# EAGLE board SparkFun_ProDriver_TC78H670FTG-Panel (EAGLE 9.6.2), part 1 of 2
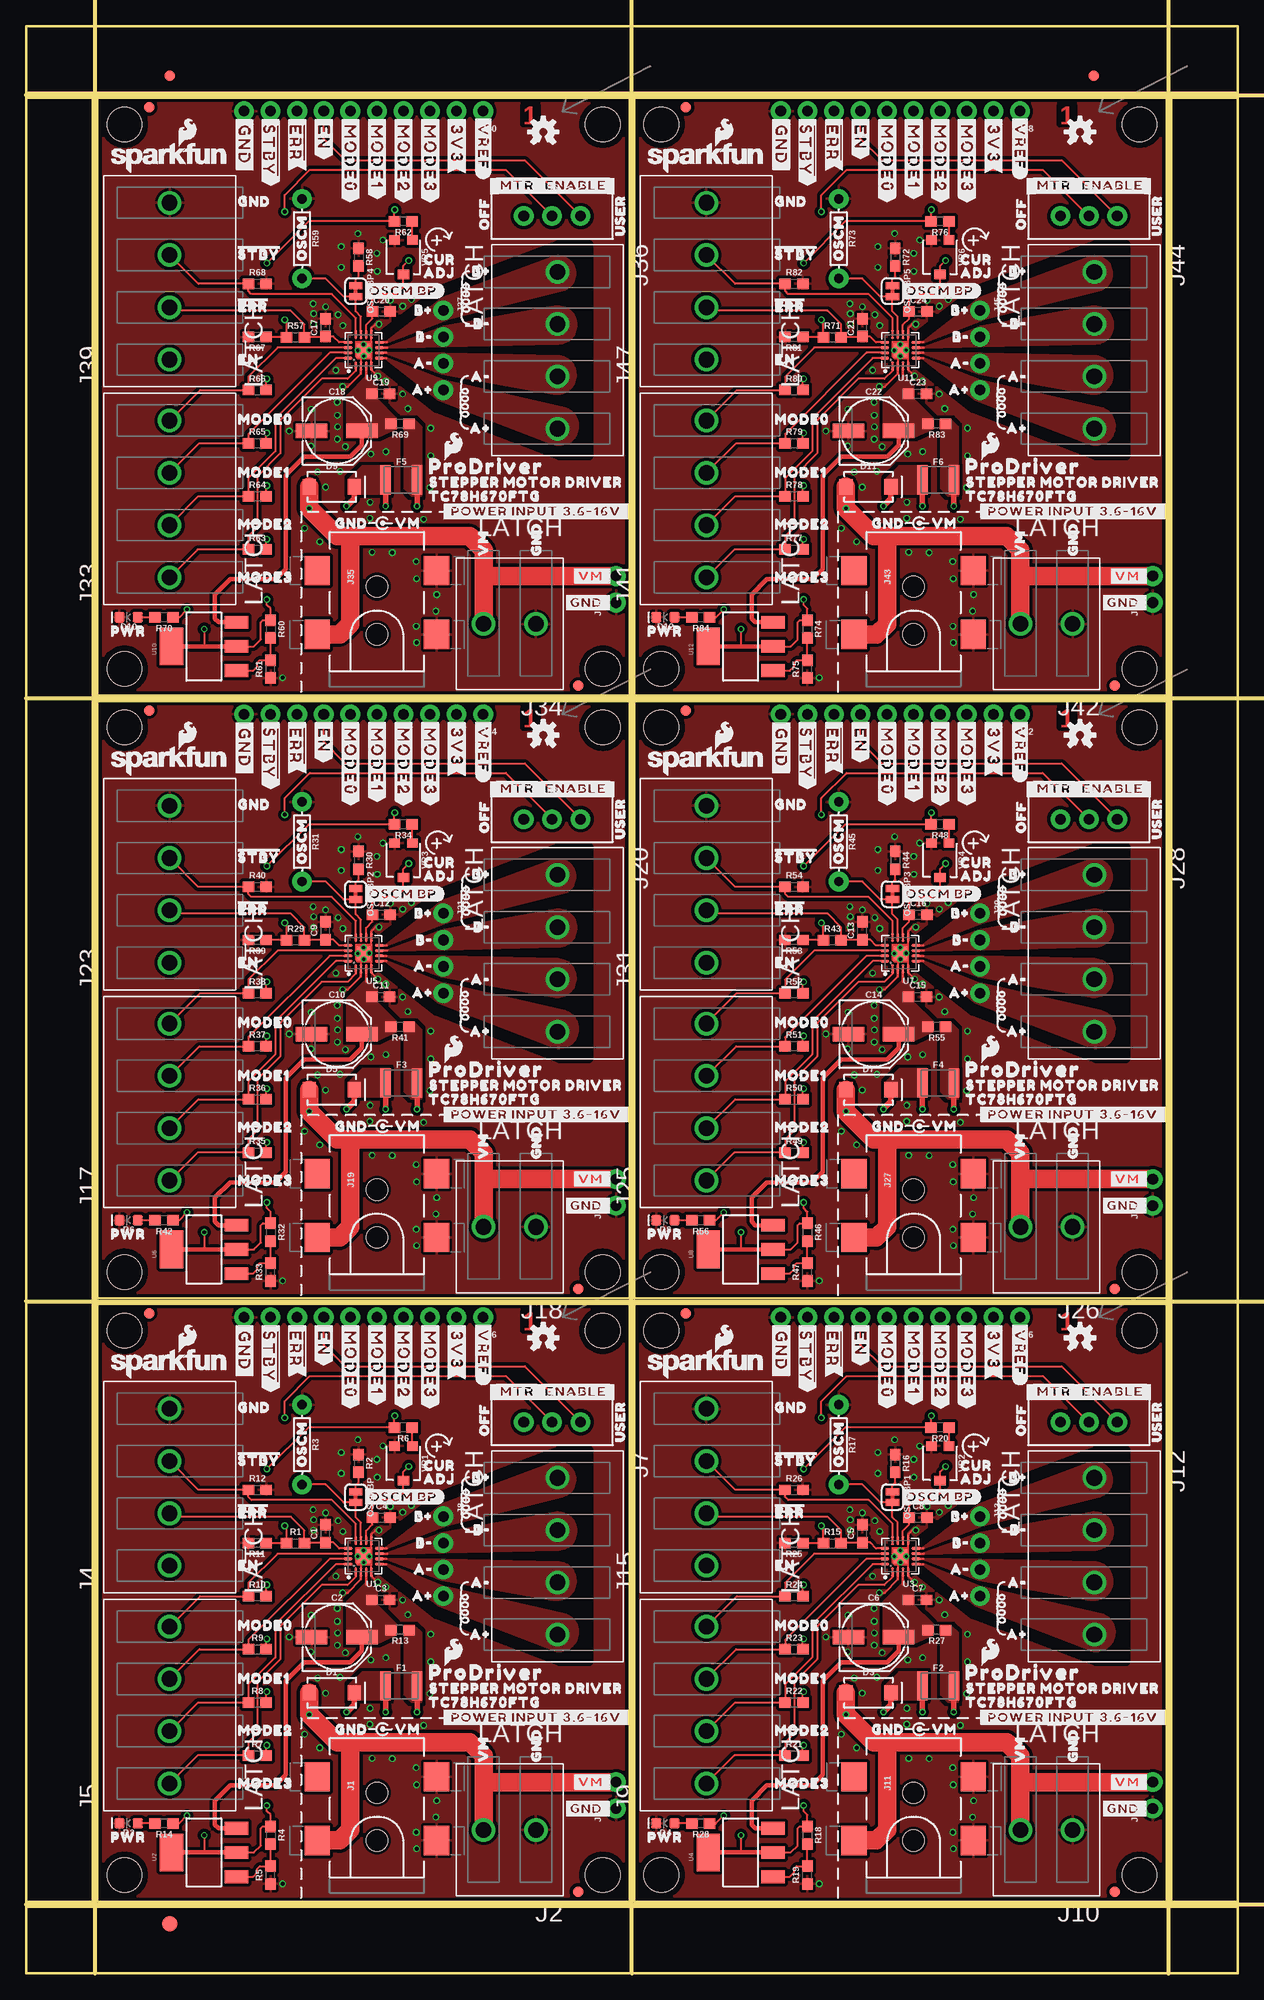
[diagram p0: board, top side]
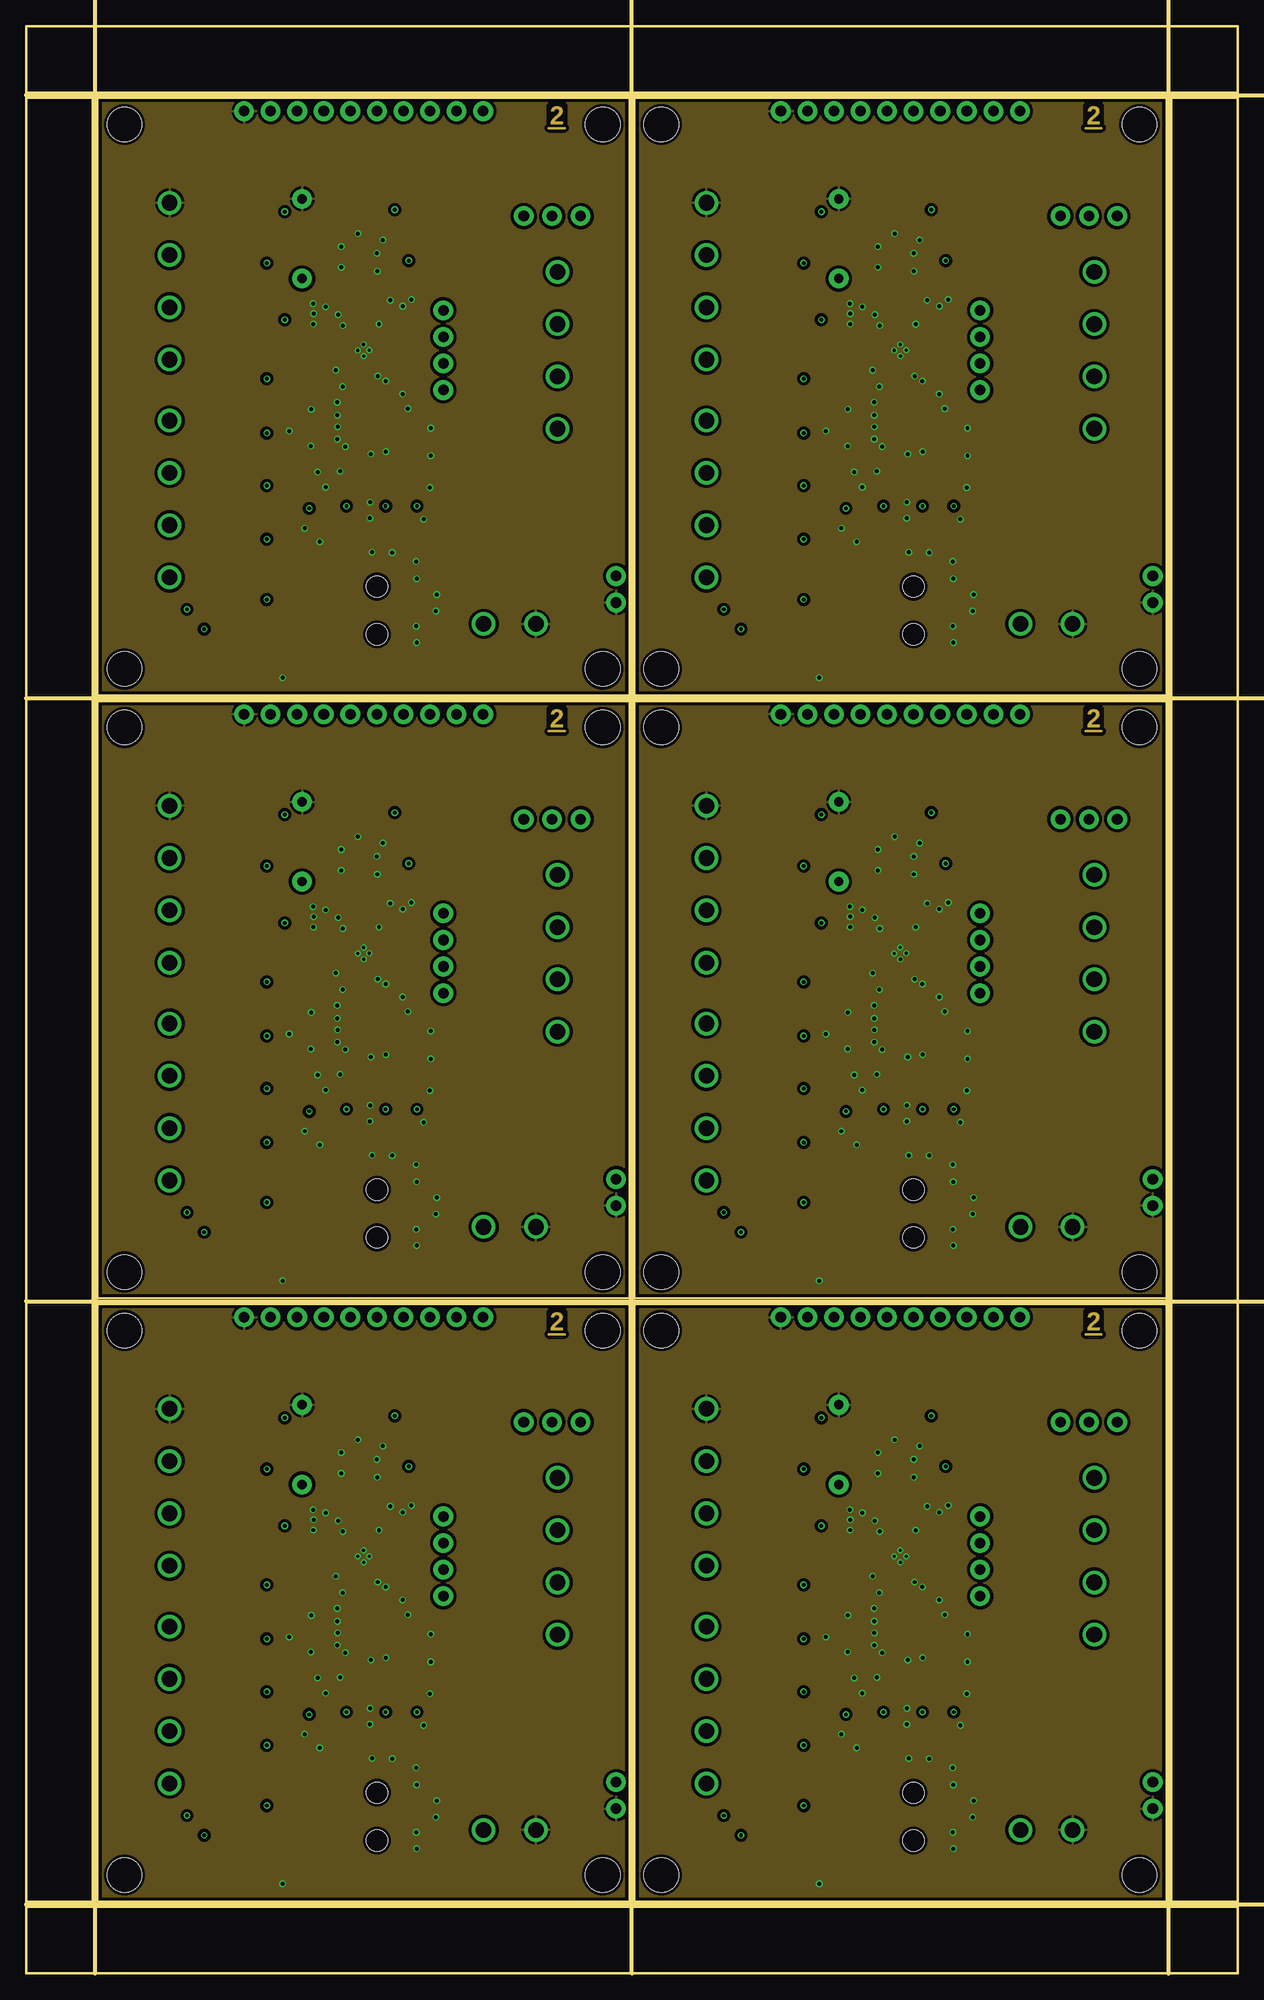
[diagram p1: board, inner layer Route2]
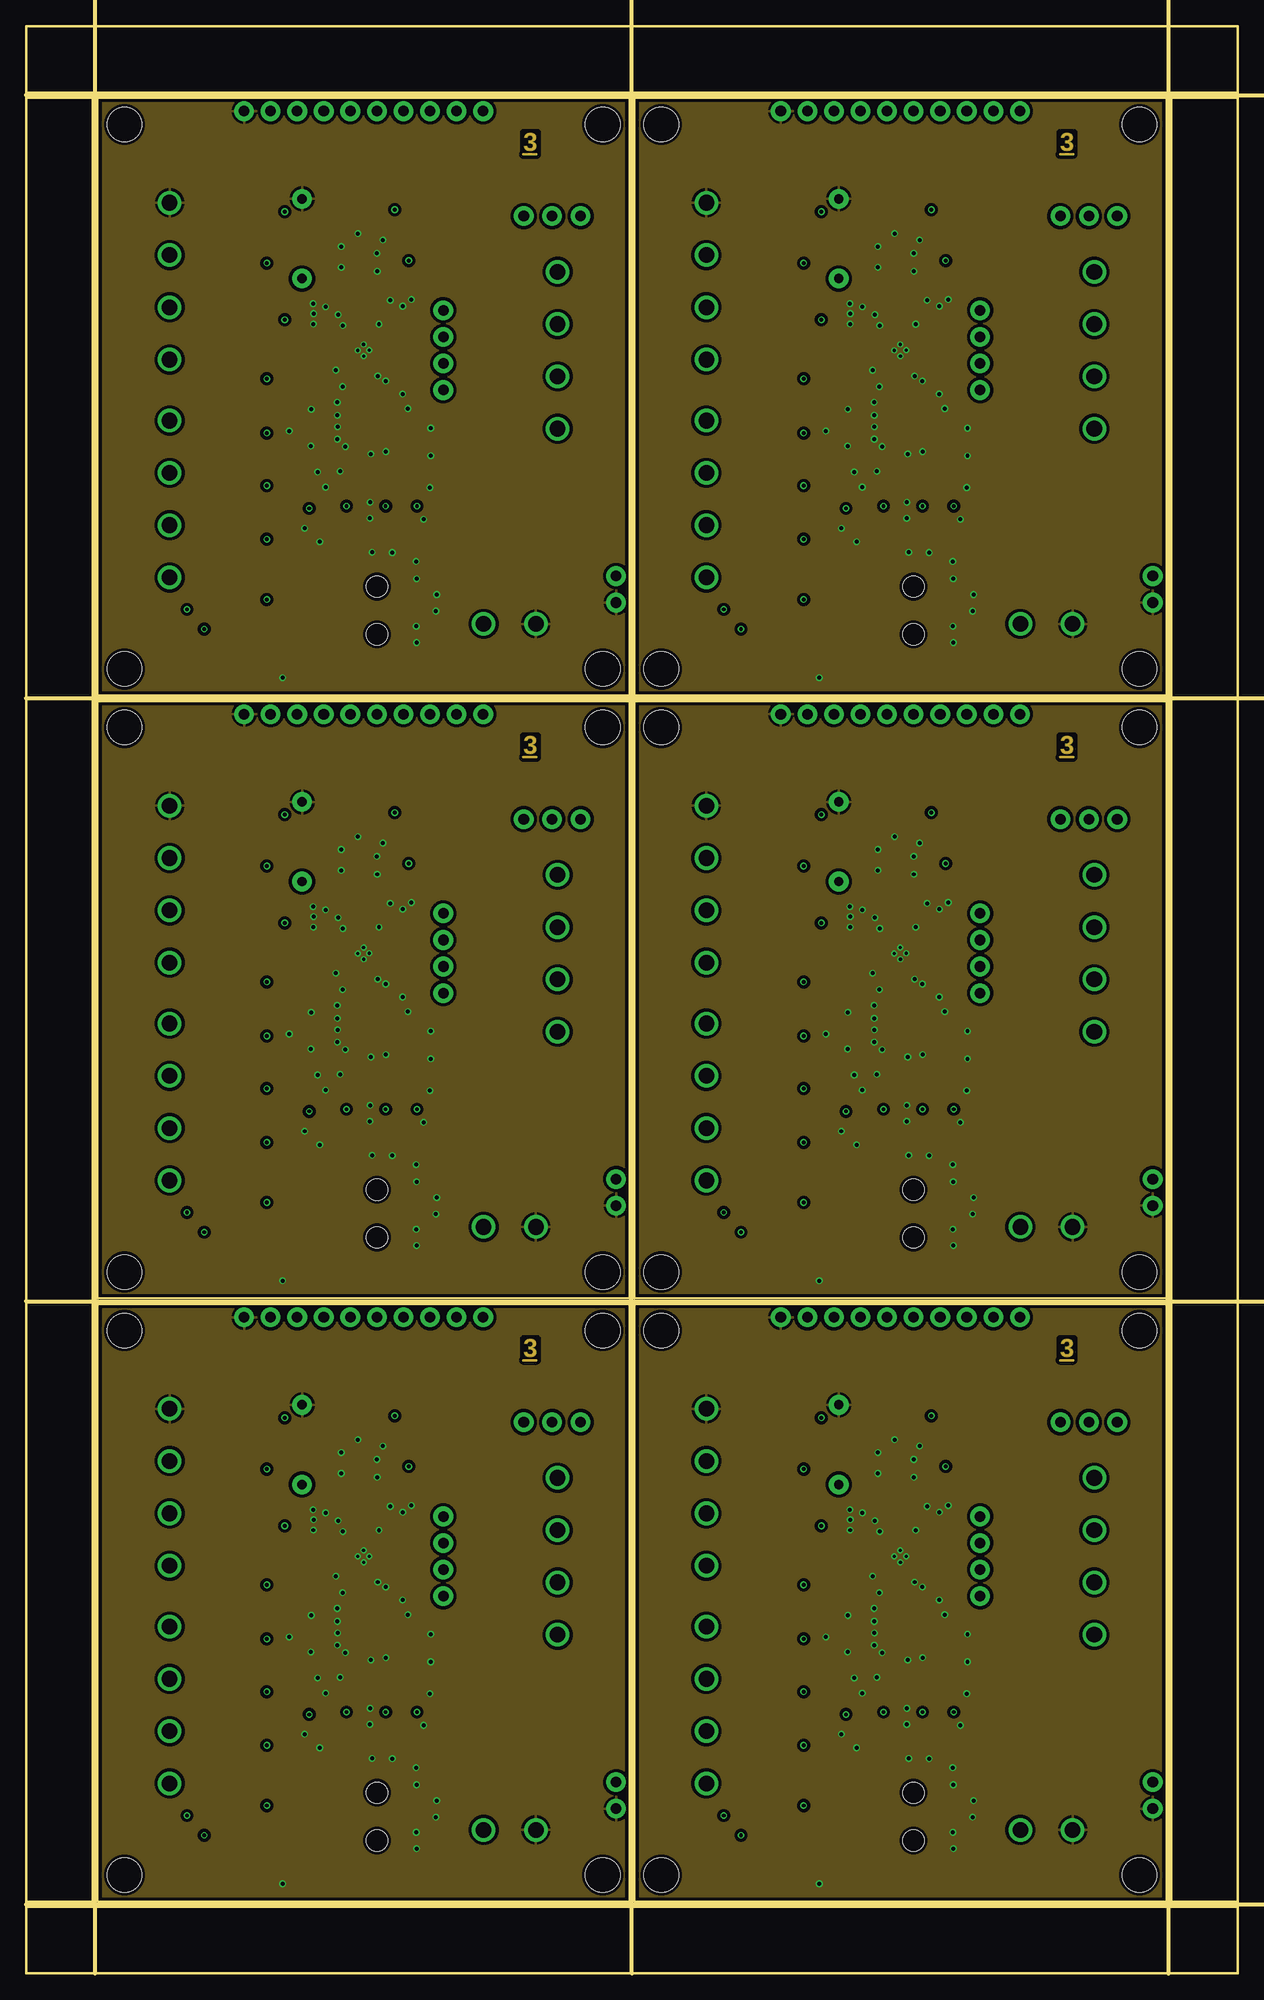
[diagram p2: board, inner layer Route15]
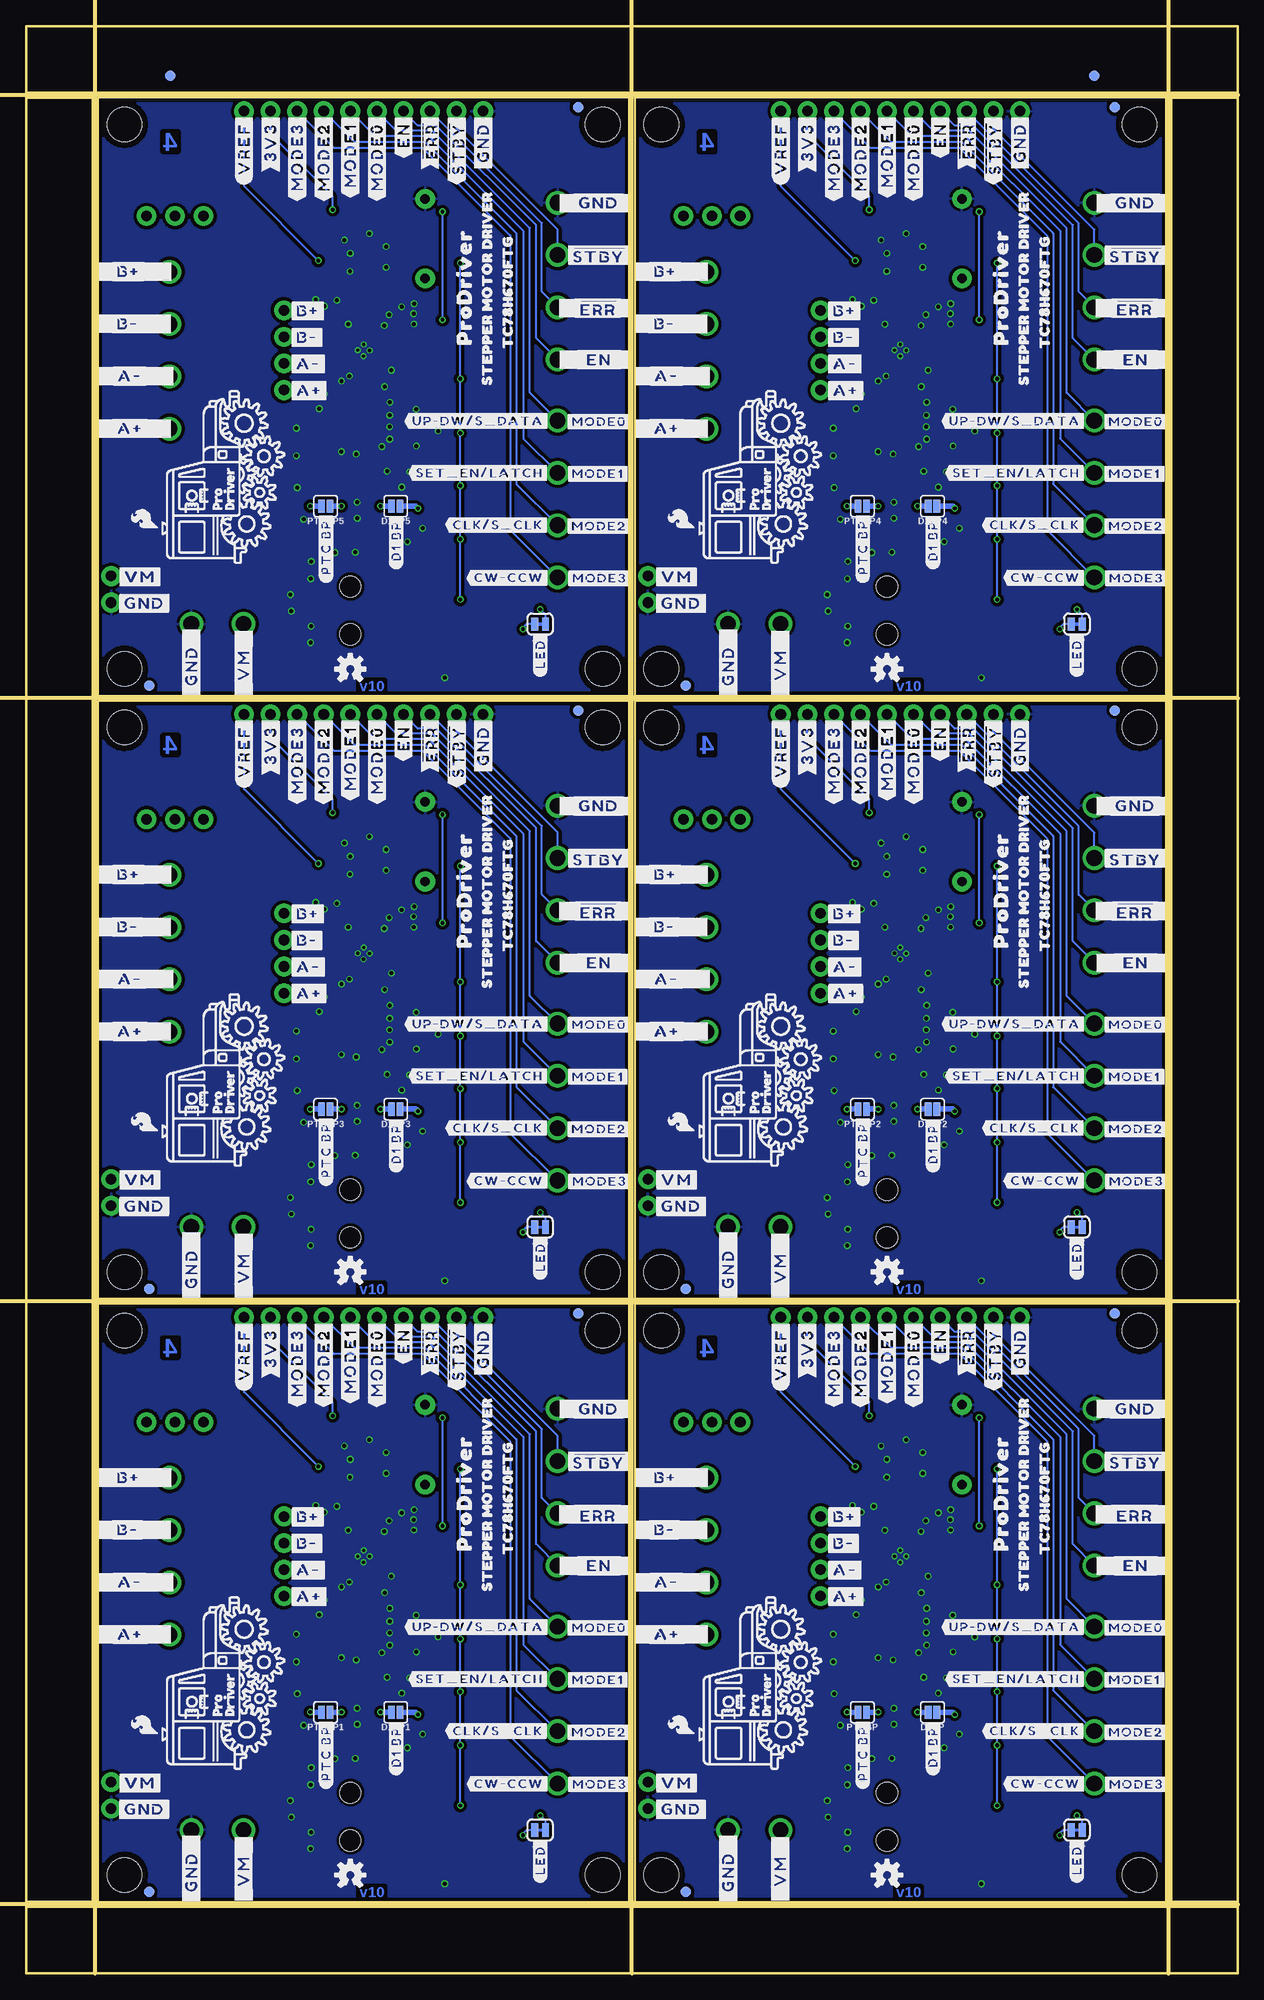
[diagram p3: board, bottom side, seen from below]

Size 115.82 x 186.18 mm. Coordinates in mm from the lower left corner, seen from the top.
Outline: 57.66,64.01 57.66,6.86 6.86,6.86 6.86,64.01 57.66,64.01
Outline: 108.97,64.01 108.97,6.86 58.17,6.86 58.17,64.01 108.97,64.01
Outline: 57.66,121.67 57.66,64.52 6.86,64.52 6.86,121.67 57.66,121.67
Outline: 108.97,121.67 108.97,64.52 58.17,64.52 58.17,121.67 108.97,121.67
Outline: 57.66,179.32 57.66,122.17 6.86,122.17 6.86,179.32 57.66,179.32
Outline: 108.97,179.32 108.97,122.17 58.17,122.17 58.17,179.32 108.97,179.32
Outline: 0,6.35 115.82,6.35 115.82,0 0,0 0,6.35
Outline: 109.47,179.32 115.82,179.32 115.82,6.86 109.47,6.86 109.47,179.32
Outline: 0,186.18 115.82,186.18 115.82,179.83 0,179.83 0,186.18
Outline: 0,179.32 6.35,179.32 6.35,6.86 0,6.86 0,179.32
Copper layers (1*2*15*16): Top 0.035559375mm / dielectric 0.47751875mm / Route2 0.035559375mm / dielectric 0.47751875mm / Route15 0.035559375mm / dielectric 0.47751875mm / Bottom 0.035559375mm
Design rules "SparkFun_ProDriver_TC78H670FTG": minimum track width 4mil, minimum drill 6mil, track to track 5mil, track to pad 5mil, pad to pad 5mil, via to via 5mil, smd to smd 5mil, copper to edge 4mil, drill to drill 4mil, minimum pad ring 5mil, minimum via ring 5mil, stop-mask expansion 4mil, vias tented up to drill 25mil, thermal gap 10mil
tRestrict: area 33.3,38.3 to 33.4,38.5; area 33.3,41.3 to 33.4,41.5; area 84.6,38.3 to 84.7,38.5; area 84.6,41.3 to 84.7,41.5; area 33.3,96 to 33.4,96.1; area 33.3,99 to 33.4,99.2; area 84.6,96 to 84.7,96.1; area 84.6,99 to 84.7,99.2; area 33.3,153.6 to 33.4,153.8; area 33.3,156.6 to 33.4,156.8; area 84.6,153.6 to 84.7,153.8; area 84.6,156.6 to 84.7,156.8; 42 lines
Milling: 7 lines

## Footprints (pad centres in the part's own frame; a part is rotated, then mirrored left to right if it is on the bottom)
0603 = smd 1.1 x 1: 1 -0.85,0; 2 0.85,0
PANASONIC_D = smd 3 x 1.4: + 2.4,0; - -2.4,0
SMA-DIODE = smd 1.27 x 1.47: A -2.15,0; C 2.15,0
SMT-JUMPER_2_NO_SILK = smd 0.635 x 1.27: 1 -0.406,0; 2 0.406,0
LED-0603 = smd 1 x 1: A -0.877,0; C 0.877,0
FIDUCIAL-1X2 = smd 1 x 1: 1 0,0
FIDUCIAL-1.5X3 = smd 1.5 x 1.5: 1 0,0
1210 = smd 1 x 2.8: 1 -1.5,0; 2 1.5,0
POWER_JACK_SMD_OVERPASTE_TOE = smd 2.8 x 2.4: GND 0,-5.7; P$4 6.1,-5.7; VIN0 0,5.7; VIN1 6.1,5.7 | hole 2.032: 0,0; 4.572,0
LATCHTERMINAL-5MM-2 = drill 1.5: 1 -2.5,0; 2 2.5,0
1X02_NO_SILK = drill 1.016 pad 1.88: 1 0,0; 2 2.54,0
LATCHTERMINAL-5MM-4 = drill 1.5: 1 -7.5,0; 2 -2.5,0; 3 2.5,0; 4 7.5,0
1X10_NO_SILK = drill 1.016 pad 1.88: 1 0,0; 2 2.54,0; 3 5.08,0; 4 7.62,0; 5 10.16,0; 6 12.7,0; 7 15.24,0; 8 17.78,0; 9 20.32,0; 10 22.86,0
1X04_NO_SILK = drill 1.016 pad 1.88: 1 0,0; 2 2.54,0; 3 5.08,0; 4 7.62,0
SMT-JUMPER_2_NC_TRACE_SILK = smd 0.66 x 1.27: 1 -0.521,0; 2 0.521,0
AXIAL-0.3 = drill 0.9 pad 1.88: P$1 -3.81,0; P$2 3.81,0
SWITCH_SPDT_PTH_11.6X4.0MM_LOCK = drill 1.016 pad 1.88: 1 0,2.718; 2 0,0; 3 0,-2.718
STAND-OFF = hole 3.302: 0,0
P-VQFN16-0303-0.50-001 = smd 0.255 x 0.85: 1 0.75,1.498; 2 0.25,1.498; 3 -0.25,1.498; 4 -0.75,1.498; 9 -0.75,-1.506; 10 -0.25,-1.506; 11 0.25,-1.506; 12 0.75,-1.506 | smd 0.85 x 0.255: 5 -1.508,0.75; 6 -1.5,0.25; 7 -1.508,-0.25; 8 -1.508,-0.75; 13 1.496,-0.75; 14 1.496,-0.25; 15 1.496,0.25; 16 1.496,0.75 | smd 1.3 x 1.3: 17 0,0
SOT223 = smd 1.219 x 2.235: 1 -2.311,-3.099; 2 0,-3.099; 3 2.311,-3.099 | smd 3.6 x 2.2: 4 0,3.099
TRIMPOT-SMD-3MM-CLOSED = smd 1 x 0.9: 1 -0.85,-1.65; 3 0.85,-1.65 | smd 1.1 x 0.9: 2 0,1.65

## Placement (x,y rotation side)
C1  22nF  [0603]  28.63,42.04 90 top
C2  47uF  [PANASONIC_D]  29.69,32.15 0 top
C3  0.1uF  [0603]  33.9,35.71 0 top
C4  0.1uF  [0603]  33.95,43.58 0 top
C5  22nF  [0603]  79.93,42.04 90 top
C6  47uF  [PANASONIC_D]  81,32.15 0 top
C7  0.1uF  [0603]  85.21,35.71 0 top
C8  0.1uF  [0603]  85.26,43.58 0 top
C9  22nF  [0603]  28.63,99.7 90 top
C10  47uF  [PANASONIC_D]  29.69,89.81 0 top
C11  0.1uF  [0603]  33.9,93.37 0 top
C12  0.1uF  [0603]  33.95,101.24 0 top
C13  22nF  [0603]  79.93,99.7 90 top
C14  47uF  [PANASONIC_D]  81,89.81 0 top
C15  0.1uF  [0603]  85.21,93.37 0 top
C16  0.1uF  [0603]  85.26,101.24 0 top
C17  22nF  [0603]  28.63,157.35 90 top
C18  47uF  [PANASONIC_D]  29.69,147.47 0 top
C19  0.1uF  [0603]  33.9,151.03 0 top
C20  0.1uF  [0603]  33.95,158.89 0 top
C21  22nF  [0603]  79.93,157.35 90 top
C22  47uF  [PANASONIC_D]  81,147.47 0 top
C23  0.1uF  [0603]  85.21,151.03 0 top
C24  0.1uF  [0603]  85.26,158.89 0 top
D1  3A/40V/500mV  [SMA-DIODE]  29.21,26.82 0 top
D1BP  [SMT-JUMPER_2_NO_SILK]  29.18,24.97 180 bottom
D1BP1  [SMT-JUMPER_2_NO_SILK]  80.49,24.97 180 bottom
D1BP2  [SMT-JUMPER_2_NO_SILK]  29.18,82.63 180 bottom
D1BP3  [SMT-JUMPER_2_NO_SILK]  80.49,82.63 180 bottom
D1BP4  [SMT-JUMPER_2_NO_SILK]  29.18,140.28 180 bottom
D1BP5  [SMT-JUMPER_2_NO_SILK]  80.49,140.28 180 bottom
D2  RED  [LED-0603]  9.79,14.35 180 top
D3  3A/40V/500mV  [SMA-DIODE]  80.52,26.82 0 top
D4  RED  [LED-0603]  61.1,14.35 180 top
D5  3A/40V/500mV  [SMA-DIODE]  29.21,84.48 0 top
D6  RED  [LED-0603]  9.79,72.01 180 top
D7  3A/40V/500mV  [SMA-DIODE]  80.52,84.48 0 top
D8  RED  [LED-0603]  61.1,72.01 180 top
D9  3A/40V/500mV  [SMA-DIODE]  29.21,142.14 0 top
D10  RED  [LED-0603]  9.79,129.67 180 top
D11  3A/40V/500mV  [SMA-DIODE]  80.52,142.14 0 top
D12  RED  [LED-0603]  61.1,129.67 180 top
E$1  [FIDUCIAL-1X2]  13.72,181.42 0 top
E$2  [FIDUCIAL-1X2]  13.72,181.42 0 bottom
E$3  [FIDUCIAL-1X2]  102.04,181.42 0 top
E$4  [FIDUCIAL-1X2]  102.04,181.42 0 bottom
E$5  [FIDUCIAL-1.5X3]  13.72,4.76 0 top
F1  16V/1.1A(2.2A TRIP)  [1210]  35.86,27.48 0 top
F2  16V/1.1A(2.2A TRIP)  [1210]  87.17,27.48 0 top
F3  16V/1.1A(2.2A TRIP)  [1210]  35.86,85.14 0 top
F4  16V/1.1A(2.2A TRIP)  [1210]  87.17,85.14 0 top
F5  16V/1.1A(2.2A TRIP)  [1210]  35.86,142.8 0 top
F6  16V/1.1A(2.2A TRIP)  [1210]  87.17,142.8 0 top
FID1  FIDUCIAL1X2  [FIDUCIAL-1X2]  11.76,63.1 90 top
FID2  FIDUCIAL1X2  [FIDUCIAL-1X2]  52.77,7.8 90 top
FID3  FIDUCIAL1X2  [FIDUCIAL-1X2]  11.76,63.1 0 bottom
FID4  FIDUCIAL1X2  [FIDUCIAL-1X2]  52.77,7.8 0 bottom
FID5  FIDUCIAL1X2  [FIDUCIAL-1X2]  63.07,63.1 90 top
FID6  FIDUCIAL1X2  [FIDUCIAL-1X2]  104.07,7.8 90 top
FID7  FIDUCIAL1X2  [FIDUCIAL-1X2]  63.07,63.1 0 bottom
FID8  FIDUCIAL1X2  [FIDUCIAL-1X2]  104.07,7.8 0 bottom
FID9  FIDUCIAL1X2  [FIDUCIAL-1X2]  11.76,120.76 90 top
FID10  FIDUCIAL1X2  [FIDUCIAL-1X2]  52.77,65.46 90 top
FID11  FIDUCIAL1X2  [FIDUCIAL-1X2]  11.76,120.76 0 bottom
FID12  FIDUCIAL1X2  [FIDUCIAL-1X2]  52.77,65.46 0 bottom
FID13  FIDUCIAL1X2  [FIDUCIAL-1X2]  63.07,120.76 90 top
FID14  FIDUCIAL1X2  [FIDUCIAL-1X2]  104.07,65.46 90 top
FID15  FIDUCIAL1X2  [FIDUCIAL-1X2]  63.07,120.76 0 bottom
FID16  FIDUCIAL1X2  [FIDUCIAL-1X2]  104.07,65.46 0 bottom
FID17  FIDUCIAL1X2  [FIDUCIAL-1X2]  11.76,178.42 90 top
FID18  FIDUCIAL1X2  [FIDUCIAL-1X2]  52.77,123.12 90 top
FID19  FIDUCIAL1X2  [FIDUCIAL-1X2]  11.76,178.42 0 bottom
FID20  FIDUCIAL1X2  [FIDUCIAL-1X2]  52.77,123.12 0 bottom
FID21  FIDUCIAL1X2  [FIDUCIAL-1X2]  63.07,178.42 90 top
FID22  FIDUCIAL1X2  [FIDUCIAL-1X2]  104.07,123.12 90 top
FID23  FIDUCIAL1X2  [FIDUCIAL-1X2]  63.07,178.42 0 bottom
FID24  FIDUCIAL1X2  [FIDUCIAL-1X2]  104.07,123.12 0 bottom
J1  [POWER_JACK_SMD_OVERPASTE_TOE]  33.53,12.7 90 top
J2  LATCH  [LATCHTERMINAL-5MM-2]  46.23,13.72 180 top
J3  PTH  [1X02_NO_SILK]  56.39,15.75 90 top
J4  LATCH  [LATCHTERMINAL-5MM-4]  13.72,46.48 90 top
J5  LATCH  [LATCHTERMINAL-5MM-4]  13.72,25.65 90 top
J6  PTH  [1X10_NO_SILK]  43.69,62.74 180 top
J7  LATCH  [LATCHTERMINAL-5MM-4]  50.8,39.88 270 top
J8  PTH  [1X04_NO_SILK]  39.88,43.69 270 top
J9  LATCH  [LATCHTERMINAL-5MM-4]  65.02,25.65 90 top
J10  LATCH  [LATCHTERMINAL-5MM-2]  97.54,13.72 180 top
J11  [POWER_JACK_SMD_OVERPASTE_TOE]  84.84,12.7 90 top
J12  LATCH  [LATCHTERMINAL-5MM-4]  102.11,39.88 270 top
J13  PTH  [1X04_NO_SILK]  91.19,43.69 270 top
J14  PTH  [1X02_NO_SILK]  107.7,15.75 90 top
J15  LATCH  [LATCHTERMINAL-5MM-4]  65.02,46.48 90 top
J16  PTH  [1X10_NO_SILK]  95,62.74 180 top
J17  LATCH  [LATCHTERMINAL-5MM-4]  13.72,83.31 90 top
J18  LATCH  [LATCHTERMINAL-5MM-2]  46.23,71.37 180 top
J19  [POWER_JACK_SMD_OVERPASTE_TOE]  33.53,70.36 90 top
J20  LATCH  [LATCHTERMINAL-5MM-4]  50.8,97.54 270 top
J21  PTH  [1X04_NO_SILK]  39.88,101.35 270 top
J22  PTH  [1X02_NO_SILK]  56.39,73.41 90 top
J23  LATCH  [LATCHTERMINAL-5MM-4]  13.72,104.14 90 top
J24  PTH  [1X10_NO_SILK]  43.69,120.4 180 top
J25  LATCH  [LATCHTERMINAL-5MM-4]  65.02,83.31 90 top
J26  LATCH  [LATCHTERMINAL-5MM-2]  97.54,71.37 180 top
J27  [POWER_JACK_SMD_OVERPASTE_TOE]  84.84,70.36 90 top
J28  LATCH  [LATCHTERMINAL-5MM-4]  102.11,97.54 270 top
J29  PTH  [1X04_NO_SILK]  91.19,101.35 270 top
J30  PTH  [1X02_NO_SILK]  107.7,73.41 90 top
J31  LATCH  [LATCHTERMINAL-5MM-4]  65.02,104.14 90 top
J32  PTH  [1X10_NO_SILK]  95,120.4 180 top
J33  LATCH  [LATCHTERMINAL-5MM-4]  13.72,140.97 90 top
J34  LATCH  [LATCHTERMINAL-5MM-2]  46.23,129.03 180 top
J35  [POWER_JACK_SMD_OVERPASTE_TOE]  33.53,128.02 90 top
J36  LATCH  [LATCHTERMINAL-5MM-4]  50.8,155.19 270 top
J37  PTH  [1X04_NO_SILK]  39.88,159 270 top
J38  PTH  [1X02_NO_SILK]  56.39,131.06 90 top
J39  LATCH  [LATCHTERMINAL-5MM-4]  13.72,161.8 90 top
J40  PTH  [1X10_NO_SILK]  43.69,178.05 180 top
J41  LATCH  [LATCHTERMINAL-5MM-4]  65.02,140.97 90 top
J42  LATCH  [LATCHTERMINAL-5MM-2]  97.54,129.03 180 top
J43  [POWER_JACK_SMD_OVERPASTE_TOE]  84.84,128.02 90 top
J44  LATCH  [LATCHTERMINAL-5MM-4]  102.11,155.19 270 top
J45  PTH  [1X04_NO_SILK]  91.19,159 270 top
J46  PTH  [1X02_NO_SILK]  107.7,131.06 90 top
J47  LATCH  [LATCHTERMINAL-5MM-4]  65.02,161.8 90 top
J48  PTH  [1X10_NO_SILK]  95,178.05 180 top
JP1  LED  [SMT-JUMPER_2_NC_TRACE_SILK]  66.7,13.69 180 bottom
JP2  LED  [SMT-JUMPER_2_NC_TRACE_SILK]  15.39,71.35 180 bottom
JP3  LED  [SMT-JUMPER_2_NC_TRACE_SILK]  66.7,71.35 180 bottom
JP4  LED  [SMT-JUMPER_2_NC_TRACE_SILK]  15.39,13.69 180 bottom
JP5  LED  [SMT-JUMPER_2_NC_TRACE_SILK]  15.39,129.01 180 bottom
JP6  LED  [SMT-JUMPER_2_NC_TRACE_SILK]  66.7,129.01 180 bottom
LOGO1  SFE_LOGO_NAME_FLAME.1_INCH  [SFE_LOGO_NAME_FLAME_.1]  13.7,58.3 0 top
LOGO2  OSHW-LOGOS  [OSHW-LOGO-S]  49.43,60.75 0 top
LOGO3  SFE_LOGO_NAME_FLAME.1_INCH  [SFE_LOGO_NAME_FLAME_.1]  65,58.3 0 top
LOGO4  OSHW-LOGOS  [OSHW-LOGO-S]  100.74,60.75 0 top
LOGO5  SFE_LOGO_NAME_FLAME.1_INCH  [SFE_LOGO_FLAME_.1]  53.24,23.76 90 bottom
LOGO6  SFE_LOGO_FLAME.1_INCH  [SFE_LOGO_FLAME_.1]  40.85,30.72 0 top
LOGO7  SFE_LOGO_NAME_FLAME.1_INCH  [SFE_LOGO_FLAME_.1]  104.54,23.76 90 bottom
LOGO8  SFE_LOGO_FLAME.1_INCH  [SFE_LOGO_FLAME_.1]  92.16,30.72 0 top
LOGO9  SFE_LOGO_NAME_FLAME.1_INCH  [SFE_LOGO_NAME_FLAME_.1]  13.7,115.96 0 top
LOGO10  OSHW-LOGOS  [OSHW-LOGO-S]  49.43,118.4 0 top
LOGO11  SFE_LOGO_NAME_FLAME.1_INCH  [SFE_LOGO_FLAME_.1]  53.24,81.42 90 bottom
LOGO12  SFE_LOGO_FLAME.1_INCH  [SFE_LOGO_FLAME_.1]  40.85,88.38 0 top
LOGO13  SFE_LOGO_NAME_FLAME.1_INCH  [SFE_LOGO_NAME_FLAME_.1]  65,115.96 0 top
LOGO14  OSHW-LOGOS  [OSHW-LOGO-S]  100.74,118.4 0 top
LOGO15  SFE_LOGO_NAME_FLAME.1_INCH  [SFE_LOGO_FLAME_.1]  104.54,81.42 90 bottom
LOGO16  SFE_LOGO_FLAME.1_INCH  [SFE_LOGO_FLAME_.1]  92.16,88.38 0 top
LOGO17  SFE_LOGO_NAME_FLAME.1_INCH  [SFE_LOGO_NAME_FLAME_.1]  13.7,173.61 0 top
LOGO18  OSHW-LOGOS  [OSHW-LOGO-S]  49.43,176.06 0 top
LOGO19  SFE_LOGO_NAME_FLAME.1_INCH  [SFE_LOGO_FLAME_.1]  53.24,139.08 90 bottom
LOGO20  SFE_LOGO_FLAME.1_INCH  [SFE_LOGO_FLAME_.1]  40.85,146.03 0 top
LOGO21  SFE_LOGO_NAME_FLAME.1_INCH  [SFE_LOGO_NAME_FLAME_.1]  65,173.61 0 top
LOGO22  OSHW-LOGOS  [OSHW-LOGO-S]  100.74,176.06 0 top
LOGO23  SFE_LOGO_NAME_FLAME.1_INCH  [SFE_LOGO_FLAME_.1]  104.54,139.08 90 bottom
LOGO24  SFE_LOGO_FLAME.1_INCH  [SFE_LOGO_FLAME_.1]  92.16,146.03 0 top
OSCMBP  [SMT-JUMPER_2_NC_TRACE_SILK]  31.5,45.53 270 top
OSCMBP1  [SMT-JUMPER_2_NC_TRACE_SILK]  82.81,45.53 270 top
OSCMBP2  [SMT-JUMPER_2_NC_TRACE_SILK]  31.5,103.19 270 top
OSCMBP3  [SMT-JUMPER_2_NC_TRACE_SILK]  82.81,103.19 270 top
OSCMBP4  [SMT-JUMPER_2_NC_TRACE_SILK]  31.5,160.85 270 top
OSCMBP5  [SMT-JUMPER_2_NC_TRACE_SILK]  82.81,160.85 270 top
PTCBP  [SMT-JUMPER_2_NO_SILK]  35.89,24.97 180 bottom
PTCBP1  [SMT-JUMPER_2_NO_SILK]  87.2,24.97 180 bottom
PTCBP2  [SMT-JUMPER_2_NO_SILK]  35.89,82.63 180 bottom
PTCBP3  [SMT-JUMPER_2_NO_SILK]  87.2,82.63 180 bottom
PTCBP4  [SMT-JUMPER_2_NO_SILK]  35.89,140.28 180 bottom
PTCBP5  [SMT-JUMPER_2_NO_SILK]  87.2,140.28 180 bottom
R1  10k  [0603]  25.76,41.12 0 top
R2  47k  [0603]  31.77,48.77 270 top
R3  DNP  [AXIAL-0.3]  26.37,50.55 270 top
R4  240  [0603]  23.37,13.21 270 top
R5  390  [0603]  23.37,9.4 90 top
R6  8.2k  [0603]  36.04,52.2 180 top
R7  22k  [0603]  22.1,20.83 0 top
R8  22k  [0603]  22.1,25.91 0 top
R9  22k  [0603]  22.1,30.99 0 top
R10  22k  [0603]  22.1,36.07 0 top
R11  22k  [0603]  22.09,41.14 180 top
R12  22k  [0603]  22.1,46.23 0 top
R13  0  [0603]  35.74,32.84 180 top
R14  1k  [0603]  13.17,14.33 180 top
R15  10k  [0603]  77.06,41.12 0 top
R16  47k  [0603]  83.08,48.77 270 top
R17  DNP  [AXIAL-0.3]  77.68,50.55 270 top
R18  240  [0603]  74.68,13.21 270 top
R19  390  [0603]  74.68,9.4 90 top
R20  8.2k  [0603]  87.35,52.2 180 top
R21  22k  [0603]  73.41,20.83 0 top
R22  22k  [0603]  73.41,25.91 0 top
R23  22k  [0603]  73.41,30.99 0 top
R24  22k  [0603]  73.41,36.07 0 top
R25  22k  [0603]  73.39,41.14 180 top
R26  22k  [0603]  73.41,46.23 0 top
R27  0  [0603]  87.05,32.84 180 top
R28  1k  [0603]  64.48,14.33 180 top
R29  10k  [0603]  25.76,98.78 0 top
R30  47k  [0603]  31.77,106.43 270 top
R31  DNP  [AXIAL-0.3]  26.37,108.21 270 top
R32  240  [0603]  23.37,70.87 270 top
R33  390  [0603]  23.37,67.06 90 top
R34  8.2k  [0603]  36.04,109.86 180 top
R35  22k  [0603]  22.1,78.49 0 top
R36  22k  [0603]  22.1,83.57 0 top
R37  22k  [0603]  22.1,88.65 0 top
R38  22k  [0603]  22.1,93.73 0 top
R39  22k  [0603]  22.09,98.8 180 top
R40  22k  [0603]  22.1,103.89 0 top
R41  0  [0603]  35.74,90.5 180 top
R42  1k  [0603]  13.17,71.99 180 top
R43  10k  [0603]  77.06,98.78 0 top
R44  47k  [0603]  83.08,106.43 270 top
R45  DNP  [AXIAL-0.3]  77.68,108.21 270 top
R46  240  [0603]  74.68,70.87 270 top
R47  390  [0603]  74.68,67.06 90 top
R48  8.2k  [0603]  87.35,109.86 180 top
R49  22k  [0603]  73.41,78.49 0 top
R50  22k  [0603]  73.41,83.57 0 top
R51  22k  [0603]  73.41,88.65 0 top
R52  22k  [0603]  73.41,93.73 0 top
R53  22k  [0603]  73.39,98.8 180 top
R54  22k  [0603]  73.41,103.89 0 top
R55  0  [0603]  87.05,90.5 180 top
R56  1k  [0603]  64.48,71.99 180 top
R57  10k  [0603]  25.76,156.44 0 top
R58  47k  [0603]  31.77,164.08 270 top
R59  DNP  [AXIAL-0.3]  26.37,165.86 270 top
R60  240  [0603]  23.37,128.52 270 top
R61  390  [0603]  23.37,124.71 90 top
R62  8.2k  [0603]  36.04,167.51 180 top
R63  22k  [0603]  22.1,136.14 0 top
R64  22k  [0603]  22.1,141.22 0 top
R65  22k  [0603]  22.1,146.3 0 top
R66  22k  [0603]  22.1,151.38 0 top
R67  22k  [0603]  22.09,156.46 180 top
R68  22k  [0603]  22.1,161.54 0 top
R69  0  [0603]  35.74,148.16 180 top
R70  1k  [0603]  13.17,129.65 180 top
R71  10k  [0603]  77.06,156.44 0 top
R72  47k  [0603]  83.08,164.08 270 top
R73  DNP  [AXIAL-0.3]  77.68,165.86 270 top
R74  240  [0603]  74.68,128.52 270 top
R75  390  [0603]  74.68,124.71 90 top
R76  8.2k  [0603]  87.35,167.51 180 top
R77  22k  [0603]  73.41,136.14 0 top
R78  22k  [0603]  73.41,141.22 0 top
R79  22k  [0603]  73.41,146.3 0 top
R80  22k  [0603]  73.41,151.38 0 top
R81  22k  [0603]  73.39,156.46 180 top
R82  22k  [0603]  73.41,161.54 0 top
R83  0  [0603]  87.05,148.16 180 top
R84  1k  [0603]  64.48,129.65 180 top
S1  [SWITCH_SPDT_PTH_11.6X4.0MM_LOCK]  50.28,52.7 270 top
S2  [SWITCH_SPDT_PTH_11.6X4.0MM_LOCK]  101.59,52.7 270 top
S3  [SWITCH_SPDT_PTH_11.6X4.0MM_LOCK]  50.28,110.36 270 top
S4  [SWITCH_SPDT_PTH_11.6X4.0MM_LOCK]  101.59,110.36 270 top
S5  [SWITCH_SPDT_PTH_11.6X4.0MM_LOCK]  50.28,168.02 270 top
S6  [SWITCH_SPDT_PTH_11.6X4.0MM_LOCK]  101.59,168.02 270 top
STANDOFF1  STAND-OFF  [STAND-OFF]  9.4,61.47 90 top
STANDOFF2  STAND-OFF  [STAND-OFF]  55.12,61.47 90 top
STANDOFF3  STAND-OFF  [STAND-OFF]  55.12,9.4 90 top
STANDOFF4  STAND-OFF  [STAND-OFF]  9.4,9.4 90 top
STANDOFF5  STAND-OFF  [STAND-OFF]  60.71,9.4 90 top
STANDOFF6  STAND-OFF  [STAND-OFF]  106.43,9.4 90 top
STANDOFF7  STAND-OFF  [STAND-OFF]  106.43,61.47 90 top
STANDOFF8  STAND-OFF  [STAND-OFF]  60.71,61.47 90 top
STANDOFF9  STAND-OFF  [STAND-OFF]  9.4,67.06 90 top
STANDOFF10  STAND-OFF  [STAND-OFF]  55.12,67.06 90 top
STANDOFF11  STAND-OFF  [STAND-OFF]  55.12,119.13 90 top
STANDOFF12  STAND-OFF  [STAND-OFF]  9.4,119.13 90 top
STANDOFF13  STAND-OFF  [STAND-OFF]  60.71,67.06 90 top
STANDOFF14  STAND-OFF  [STAND-OFF]  106.43,67.06 90 top
STANDOFF15  STAND-OFF  [STAND-OFF]  106.43,119.13 90 top
STANDOFF16  STAND-OFF  [STAND-OFF]  60.71,119.13 90 top
STANDOFF17  STAND-OFF  [STAND-OFF]  9.4,124.71 90 top
STANDOFF18  STAND-OFF  [STAND-OFF]  55.12,124.71 90 top
STANDOFF19  STAND-OFF  [STAND-OFF]  55.12,176.78 90 top
STANDOFF20  STAND-OFF  [STAND-OFF]  9.4,176.78 90 top
STANDOFF21  STAND-OFF  [STAND-OFF]  60.71,124.71 90 top
STANDOFF22  STAND-OFF  [STAND-OFF]  106.43,124.71 90 top
STANDOFF23  STAND-OFF  [STAND-OFF]  106.43,176.78 90 top
STANDOFF24  STAND-OFF  [STAND-OFF]  60.71,176.78 90 top
U1  TC78H670FTG  [P-VQFN16-0303-0.50-001]  32.26,39.88 180 top
U2  LM1117  [SOT223]  16.99,11.56 90 top
U3  TC78H670FTG  [P-VQFN16-0303-0.50-001]  83.57,39.88 180 top
U4  LM1117  [SOT223]  68.3,11.56 90 top
U5  TC78H670FTG  [P-VQFN16-0303-0.50-001]  32.26,97.54 180 top
U6  LM1117  [SOT223]  16.99,69.22 90 top
U7  TC78H670FTG  [P-VQFN16-0303-0.50-001]  83.57,97.54 180 top
U8  LM1117  [SOT223]  68.3,69.22 90 top
U9  TC78H670FTG  [P-VQFN16-0303-0.50-001]  32.26,155.19 180 top
U10  LM1117  [SOT223]  16.99,126.87 90 top
U11  TC78H670FTG  [P-VQFN16-0303-0.50-001]  83.57,155.19 180 top
U12  LM1117  [SOT223]  68.3,126.87 90 top
U$1  [A#2]  45.07,32.41 0 top
U$2  [B#0]  45.06,42.4 0 top
U$3  [B#1]  45.06,47.42 0 top
U$4  [A#3]  45.06,37.36 0 top
U$5  [GND6]  19.56,54.1 0 top
U$6  [TC78H670FTG0]  37.79,25.91 0 top
U$7  [USER0]  56.78,50.14 90 top
U$8  [#ERR#3]  19.57,44.17 0 top
U$9  [STEPPER_MOTOR_DRIVER0]  37.86,27.25 0 top
U$10  [CUR0]  37.31,48.54 0 top
U$11  [VM10]  43.69,19.56 90 top
U$12  [GND6]  48.77,19.56 90 top
U$13  [#EN#2]  28.46,62.34 270 top
U$14  [#MTR#0]  44.62,55.64 0 top
U$15  [B#1]  39.54,43.7 0 top
U$16  [#OSCM_BP#0]  32.09,45.56 0 top
U$17  [OFF0]  43.8,50.72 90 top
U$18  [OSCM0]  26.36,47.77 90 top
U$19  [EN0]  19.56,38.99 0 top
U$20  [ADJ0]  37.31,47.27 0 top
U$21  [#ENABLE#0]  48.91,55.64 0 top
U$22  [CURRENT_ADJUST]  38.15,49.25 0 top
U$23  [MODE30]  19.56,18.16 0 top
U$24  [MODE10]  19.56,28.19 0 top
U$25  [MODE20]  19.56,23.24 0 top
U$26  [MODE00]  19.56,33.27 0 top
U$27  [#GND_#0]  51.31,15.75 0 top
U$28  [#VM_#0]  52.07,18.29 0 top
U$29  [GND6]  28.85,23.32 0 top
U$30  [VM10]  34.59,23.34 0 top
U$31  [#GND#0]  20.87,59.53 270 top
U$32  [#VREF#0]  43.7,62.34 270 top
U$33  [#MODE0#4]  31,62.34 270 top
U$34  [##ERR##5]  12.48,43.9 0 bottom
U$35  [##ERR##5]  25.92,62.34 270 top
U$36  [#_POWER_INPUT_3#6#16V_#0]  39.57,24.47 0 top
U$37  [#B##0]  56.71,47.4 0 bottom
U$38  [#LED#10]  15.38,12.93 90 bottom
U$39  [B#0]  96.37,42.4 0 top
U$40  [PRODRIVER0]  37.41,28.78 0 top
U$41  PRODRIVER_LOGO  [PRODRIVER_LOGO]  46.1,27.56 90 bottom
U$42  [B#0]  39.56,41.15 0 top
U$43  [A#3]  39.58,38.64 0 top
U$44  [A#2]  39.55,36.1 0 top
U$45  [B#1]  96.37,47.42 0 top
U$46  [#MODE1#4]  33.54,62.34 270 top
U$47  [#MODE2#4]  36.08,62.34 270 top
U$48  [#MODE3#4]  38.62,62.34 270 top
U$49  [#B##1]  56.71,42.4 0 bottom
U$50  [#A##2]  56.63,37.4 0 bottom
U$51  [#A##3]  56.67,32.4 0 bottom
U$52  [#GND#5]  9.81,53.95 0 bottom
U$53  [##STBY##1]  23.38,62.34 270 top
U$54  [##STBY##7]  23.37,62.48 90 bottom
U$55  [#_EN_#0]  9.76,38.97 0 bottom
U$56  [#B##0]  39.56,43.64 0 bottom
U$57  [#B##1]  39.56,41.1 0 bottom
U$58  [#A##2]  39.56,38.56 0 bottom
U$59  [#A##3]  39.56,36.02 0 bottom
U$60  [#MODE0#0]  9.76,33.04 0 bottom
U$61  [#MODE1#0]  9.88,28.06 0 bottom
U$62  [#MODE2#0]  9.75,23.06 0 bottom
U$63  [#MODE3#0]  9.69,18.07 0 bottom
U$64  [#D1_BP#10]  29.15,24.26 90 bottom
U$65  [#CLK#S_CLK#0]  19.43,23.16 0 bottom
U$66  [#SET_EN#LATCH#0]  21.18,28.14 0 bottom
U$67  [#UP#DW#S_DATA#0]  21.35,33.11 0 bottom
U$68  [#VM#0]  53.64,18.2 0 bottom
U$69  [#GND#0]  53.23,15.68 0 bottom
U$70  [#PTC_BP#9]  35.85,24.35 90 bottom
U$71  [OSHW-LOGO-S]  33.53,9.4 0 bottom
U$72  [#VM#0]  43.74,9.77 90 bottom
U$73  [#GND#0]  48.72,9.67 90 bottom
U$74  [#MODE0#1]  30.99,62.48 90 bottom
U$75  [#3V3#4]  41.16,62.34 270 top
U$76  [A#2]  96.38,32.41 0 top
U$77  [A#3]  96.37,37.36 0 top
U$78  [GND6]  70.87,54.1 0 top
U$79  [VM10]  95,19.56 90 top
U$80  [#VREF#4]  43.69,62.48 90 bottom
U$81  [GND6]  100.08,19.56 90 top
U$82  [#CW#CCW#0]  18.38,18.12 0 bottom
U$83  [PWR0]  7.39,13.02 0 top
U$84  [TC78H670FTG0]  18.47,39.43 90 bottom
U$85  [STEPPER_MOTOR_DRIVER0]  20.45,35.9 90 bottom
U$86  [PRODRIVER0]  22.63,39.38 90 bottom
U$87  [##STBY##0]  13.13,48.96 0 bottom
U$88  [OFF0]  95.11,50.72 90 top
U$89  [#STBY#2]  19.56,49.16 0 top
U$90  [#MODE1#1]  33.53,62.48 90 bottom
U$91  [#MODE2#2]  36.07,62.48 90 bottom
U$92  [#MODE3#3]  38.61,62.48 90 bottom
U$93  [#3V3#4]  41.15,62.48 90 bottom
U$94  [#EN#5]  28.45,62.48 90 bottom
U$95  [##ERR##6]  25.91,62.48 90 bottom
U$96  [#GND#8]  20.83,62.48 90 bottom
U$97  [OSCM0]  77.67,47.77 90 top
U$98  [CUR0]  88.62,48.54 0 top
U$99  [ADJ0]  88.62,47.27 0 top
U$100  [CURRENT_ADJUST]  89.46,49.25 0 top
U$101  [MODE30]  70.87,18.16 0 top
U$102  [MODE10]  70.87,28.19 0 top
U$103  [MODE20]  70.87,23.24 0 top
U$104  [MODE00]  70.87,33.27 0 top
U$105  [#GND_#0]  102.62,15.75 0 top
U$106  [#VM_#0]  103.38,18.29 0 top
U$107  [GND6]  80.16,23.32 0 top
U$108  [VM10]  85.9,23.34 0 top
U$109  [TC78H670FTG0]  89.1,25.91 0 top
U$110  [STEPPER_MOTOR_DRIVER0]  89.17,27.25 0 top
U$111  [#GND#0]  72.17,59.53 270 top
U$112  [PRODRIVER0]  88.72,28.78 0 top
U$113  [#MTR#0]  95.92,55.64 0 top
U$114  [#ENABLE#0]  100.22,55.64 0 top
U$115  [B#1]  90.85,43.7 0 top
U$116  [B#0]  90.86,41.15 0 top
U$117  [A#3]  90.88,38.64 0 top
U$118  [A#2]  90.86,36.1 0 top
U$119  [EN0]  70.87,38.99 0 top
U$120  [#EN#2]  79.76,62.34 270 top
U$121  [#MODE0#4]  82.3,62.34 270 top
U$122  [#MODE1#4]  84.84,62.34 270 top
U$123  [#MODE2#4]  87.38,62.34 270 top
U$124  [#MODE3#4]  89.92,62.34 270 top
U$125  [#VREF#0]  95,62.34 270 top
U$126  [#B##0]  108.01,47.4 0 bottom
U$127  [#B##1]  108.01,42.4 0 bottom
U$128  [#A##2]  107.94,37.4 0 bottom
U$129  [#A##3]  107.98,32.4 0 bottom
U$130  [#GND#5]  61.12,53.95 0 bottom
U$131  [#_EN_#0]  61.07,38.97 0 bottom
U$132  [#B##0]  90.87,43.64 0 bottom
U$133  [#B##1]  90.87,41.1 0 bottom
U$134  [#A##2]  90.87,38.56 0 bottom
U$135  [#A##3]  90.87,36.02 0 bottom
U$136  [#MODE0#0]  61.06,33.04 0 bottom
U$137  [#MODE1#0]  61.19,28.06 0 bottom
U$138  [#MODE2#0]  61.06,23.06 0 bottom
U$139  [#MODE3#0]  61,18.07 0 bottom
U$140  [#CLK#S_CLK#0]  70.74,23.16 0 bottom
U$141  [#SET_EN#LATCH#0]  72.49,28.14 0 bottom
U$142  [#UP#DW#S_DATA#0]  72.65,33.11 0 bottom
U$143  [#VM#0]  104.95,18.2 0 bottom
U$144  [#GND#0]  104.54,15.68 0 bottom
U$145  [#VM#0]  95.05,9.77 90 bottom
U$146  [#GND#0]  100.03,9.67 90 bottom
U$147  [#CW#CCW#0]  69.69,18.12 0 bottom
U$148  [PWR0]  58.7,13.02 0 top
U$149  [TC78H670FTG0]  69.77,39.43 90 bottom
U$150  [STEPPER_MOTOR_DRIVER0]  71.76,35.9 90 bottom
U$151  [PRODRIVER0]  73.94,39.38 90 bottom
U$152  [##STBY##0]  64.44,48.96 0 bottom
U$153  [##STBY##1]  74.68,62.34 270 top
U$154  [#STBY#2]  70.87,49.16 0 top
U$155  [#ERR#3]  70.88,44.17 0 top
U$156  [##ERR##5]  63.78,43.9 0 bottom
U$157  [USER0]  108.09,50.14 90 top
U$158  [#OSCM_BP#0]  83.4,45.56 0 top
U$159  PRODRIVER_LOGO  [PRODRIVER_LOGO]  97.41,27.56 90 bottom
U$160  [OSHW-LOGO-S]  84.84,9.4 0 bottom
U$161  [#MODE0#1]  82.3,62.48 90 bottom
U$162  [#MODE1#1]  84.84,62.48 90 bottom
U$163  [#MODE2#2]  87.38,62.48 90 bottom
U$164  [#MODE3#3]  89.92,62.48 90 bottom
U$165  [#3V3#4]  92.46,62.48 90 bottom
U$166  [#VREF#4]  95,62.48 90 bottom
U$167  [#EN#5]  79.76,62.48 90 bottom
U$168  [##ERR##6]  77.22,62.48 90 bottom
U$169  [##STBY##7]  74.68,62.48 90 bottom
U$170  [#GND#8]  72.14,62.48 90 bottom
U$171  [#PTC_BP#9]  87.16,24.35 90 bottom
U$172  [#D1_BP#10]  80.45,24.26 90 bottom
U$173  [#LED#10]  66.69,12.93 90 bottom
U$174  [#3V3#4]  92.46,62.34 270 top
U$175  [##ERR##5]  77.22,62.34 270 top
U$176  [#_POWER_INPUT_3#6#16V_#0]  90.88,24.47 0 top
U$177  [B#0]  45.06,100.06 0 top
U$178  [B#1]  45.06,105.08 0 top
U$179  [A#2]  45.07,90.07 0 top
U$180  [A#3]  45.06,95.02 0 top
U$181  [GND6]  19.56,111.76 0 top
U$182  [VM10]  43.69,77.22 90 top
U$183  [GND6]  48.77,77.22 90 top
U$184  [OFF0]  43.8,108.38 90 top
U$185  [OSCM0]  26.36,105.43 90 top
U$186  [CUR0]  37.31,106.2 0 top
U$187  [ADJ0]  37.31,104.93 0 top
U$188  [CURRENT_ADJUST]  38.15,106.91 0 top
U$189  [MODE30]  19.56,75.82 0 top
U$190  [MODE10]  19.56,85.85 0 top
U$191  [MODE20]  19.56,80.9 0 top
U$192  [MODE00]  19.56,90.93 0 top
U$193  [#GND_#0]  51.31,73.41 0 top
U$194  [#VM_#0]  52.07,75.95 0 top
U$195  [GND6]  28.85,80.98 0 top
U$196  [VM10]  34.59,81 0 top
U$197  [TC78H670FTG0]  37.79,83.57 0 top
U$198  [STEPPER_MOTOR_DRIVER0]  37.86,84.91 0 top
U$199  [#GND#0]  20.87,117.19 270 top
U$200  [PRODRIVER0]  37.41,86.43 0 top
U$201  [#MTR#0]  44.62,113.29 0 top
U$202  [#ENABLE#0]  48.91,113.29 0 top
U$203  [B#1]  39.54,101.35 0 top
U$204  [B#0]  39.56,98.81 0 top
U$205  [A#3]  39.58,96.3 0 top
U$206  [A#2]  39.55,93.76 0 top
U$207  [EN0]  19.56,96.65 0 top
U$208  [#EN#2]  28.46,120 270 top
U$209  [#MODE0#4]  31,120 270 top
U$210  [#MODE1#4]  33.54,120 270 top
U$211  [#MODE2#4]  36.08,120 270 top
U$212  [#MODE3#4]  38.62,120 270 top
U$213  [#VREF#0]  43.7,120 270 top
U$214  [#B##0]  56.71,105.06 0 bottom
U$215  [#B##1]  56.71,100.06 0 bottom
U$216  [#A##2]  56.63,95.06 0 bottom
U$217  [#A##3]  56.67,90.06 0 bottom
U$218  [#GND#5]  9.81,111.61 0 bottom
U$219  [#_EN_#0]  9.76,96.62 0 bottom
U$220  [#B##0]  39.56,101.3 0 bottom
U$221  [#B##1]  39.56,98.76 0 bottom
U$222  [#A##2]  39.56,96.22 0 bottom
U$223  [#A##3]  39.56,93.68 0 bottom
U$224  [#MODE0#0]  9.76,90.7 0 bottom
U$225  [#MODE1#0]  9.88,85.72 0 bottom
U$226  [#MODE2#0]  9.75,80.72 0 bottom
U$227  [#MODE3#0]  9.69,75.73 0 bottom
U$228  [#CLK#S_CLK#0]  19.43,80.82 0 bottom
U$229  [#SET_EN#LATCH#0]  21.18,85.8 0 bottom
U$230  [#UP#DW#S_DATA#0]  21.35,90.77 0 bottom
U$231  [#VM#0]  53.64,75.86 0 bottom
U$232  [#GND#0]  53.23,73.34 0 bottom
U$233  [#VM#0]  43.74,67.43 90 bottom
U$234  [#GND#0]  48.72,67.33 90 bottom
U$235  [#CW#CCW#0]  18.38,75.78 0 bottom
U$236  [PWR0]  7.39,70.68 0 top
U$237  [TC78H670FTG0]  18.47,97.09 90 bottom
U$238  [STEPPER_MOTOR_DRIVER0]  20.45,93.56 90 bottom
U$239  [PRODRIVER0]  22.63,97.03 90 bottom
U$240  [##STBY##0]  13.13,106.62 0 bottom
U$241  [##STBY##1]  23.38,120 270 top
U$242  [#STBY#2]  19.56,106.82 0 top
U$243  [#ERR#3]  19.57,101.83 0 top
U$244  [##ERR##5]  12.48,101.56 0 bottom
U$245  [USER0]  56.78,107.8 90 top
U$246  [#OSCM_BP#0]  32.09,103.22 0 top
U$247  PRODRIVER_LOGO  [PRODRIVER_LOGO]  46.1,85.22 90 bottom
U$248  [OSHW-LOGO-S]  33.53,67.06 0 bottom
U$249  [#MODE0#1]  30.99,120.14 90 bottom
U$250  [#MODE1#1]  33.53,120.14 90 bottom
U$251  [#MODE2#2]  36.07,120.14 90 bottom
U$252  [#MODE3#3]  38.61,120.14 90 bottom
U$253  [#3V3#4]  41.15,120.14 90 bottom
U$254  [#VREF#4]  43.69,120.14 90 bottom
U$255  [#EN#5]  28.45,120.14 90 bottom
U$256  [##ERR##6]  25.91,120.14 90 bottom
U$257  [##STBY##7]  23.37,120.14 90 bottom
U$258  [#GND#8]  20.83,120.14 90 bottom
U$259  [#PTC_BP#9]  35.85,82.01 90 bottom
U$260  [#D1_BP#10]  29.15,81.92 90 bottom
U$261  [#LED#10]  15.38,70.59 90 bottom
U$262  [#3V3#4]  41.16,120 270 top
U$263  [##ERR##5]  25.92,120 270 top
U$264  [#_POWER_INPUT_3#6#16V_#0]  39.57,82.13 0 top
U$265  [B#0]  96.37,100.06 0 top
U$266  [B#1]  96.37,105.08 0 top
U$267  [A#2]  96.38,90.07 0 top
U$268  [A#3]  96.37,95.02 0 top
U$269  [GND6]  70.87,111.76 0 top
U$270  [VM10]  95,77.22 90 top
U$271  [GND6]  100.08,77.22 90 top
U$272  [OFF0]  95.11,108.38 90 top
U$273  [OSCM0]  77.67,105.43 90 top
U$274  [CUR0]  88.62,106.2 0 top
U$275  [ADJ0]  88.62,104.93 0 top
U$276  [CURRENT_ADJUST]  89.46,106.91 0 top
U$277  [MODE30]  70.87,75.82 0 top
U$278  [MODE10]  70.87,85.85 0 top
U$279  [MODE20]  70.87,80.9 0 top
U$280  [MODE00]  70.87,90.93 0 top
U$281  [#GND_#0]  102.62,73.41 0 top
U$282  [#VM_#0]  103.38,75.95 0 top
U$283  [GND6]  80.16,80.98 0 top
U$284  [VM10]  85.9,81 0 top
U$285  [TC78H670FTG0]  89.1,83.57 0 top
U$286  [STEPPER_MOTOR_DRIVER0]  89.17,84.91 0 top
U$287  [#GND#0]  72.17,117.19 270 top
U$288  [PRODRIVER0]  88.72,86.43 0 top
U$289  [#MTR#0]  95.92,113.29 0 top
U$290  [#ENABLE#0]  100.22,113.29 0 top
U$291  [B#1]  90.85,101.35 0 top
U$292  [B#0]  90.86,98.81 0 top
U$293  [A#3]  90.88,96.3 0 top
U$294  [A#2]  90.86,93.76 0 top
U$295  [EN0]  70.87,96.65 0 top
U$296  [#EN#2]  79.76,120 270 top
U$297  [#MODE0#4]  82.3,120 270 top
U$298  [#MODE1#4]  84.84,120 270 top
U$299  [#MODE2#4]  87.38,120 270 top
U$300  [#MODE3#4]  89.92,120 270 top
U$301  [#VREF#0]  95,120 270 top
U$302  [#B##0]  108.01,105.06 0 bottom
U$303  [#B##1]  108.01,100.06 0 bottom
U$304  [#A##2]  107.94,95.06 0 bottom
U$305  [#A##3]  107.98,90.06 0 bottom
U$306  [#GND#5]  61.12,111.61 0 bottom
U$307  [#_EN_#0]  61.07,96.62 0 bottom
U$308  [#B##0]  90.87,101.3 0 bottom
U$309  [#B##1]  90.87,98.76 0 bottom
U$310  [#A##2]  90.87,96.22 0 bottom
U$311  [#A##3]  90.87,93.68 0 bottom
U$312  [#MODE0#0]  61.06,90.7 0 bottom
U$313  [#MODE1#0]  61.19,85.72 0 bottom
U$314  [#MODE2#0]  61.06,80.72 0 bottom
U$315  [#MODE3#0]  61,75.73 0 bottom
U$316  [#CLK#S_CLK#0]  70.74,80.82 0 bottom
U$317  [#SET_EN#LATCH#0]  72.49,85.8 0 bottom
U$318  [#UP#DW#S_DATA#0]  72.65,90.77 0 bottom
U$319  [#VM#0]  104.95,75.86 0 bottom
U$320  [#GND#0]  104.54,73.34 0 bottom
U$321  [#VM#0]  95.05,67.43 90 bottom
U$322  [#GND#0]  100.03,67.33 90 bottom
U$323  [#CW#CCW#0]  69.69,75.78 0 bottom
U$324  [PWR0]  58.7,70.68 0 top
U$325  [TC78H670FTG0]  69.77,97.09 90 bottom
U$326  [STEPPER_MOTOR_DRIVER0]  71.76,93.56 90 bottom
U$327  [PRODRIVER0]  73.94,97.03 90 bottom
U$328  [##STBY##0]  64.44,106.62 0 bottom
U$329  [##STBY##1]  74.68,120 270 top
U$330  [#STBY#2]  70.87,106.82 0 top
U$331  [#ERR#3]  70.88,101.83 0 top
U$332  [##ERR##5]  63.78,101.56 0 bottom
U$333  [USER0]  108.09,107.8 90 top
U$334  [#OSCM_BP#0]  83.4,103.22 0 top
U$335  PRODRIVER_LOGO  [PRODRIVER_LOGO]  97.41,85.22 90 bottom
U$336  [OSHW-LOGO-S]  84.84,67.06 0 bottom
U$337  [#MODE0#1]  82.3,120.14 90 bottom
U$338  [#MODE1#1]  84.84,120.14 90 bottom
U$339  [#MODE2#2]  87.38,120.14 90 bottom
U$340  [#MODE3#3]  89.92,120.14 90 bottom
U$341  [#3V3#4]  92.46,120.14 90 bottom
U$342  [#VREF#4]  95,120.14 90 bottom
U$343  [#EN#5]  79.76,120.14 90 bottom
U$344  [##ERR##6]  77.22,120.14 90 bottom
U$345  [##STBY##7]  74.68,120.14 90 bottom
U$346  [#GND#8]  72.14,120.14 90 bottom
U$347  [#PTC_BP#9]  87.16,82.01 90 bottom
U$348  [#D1_BP#10]  80.45,81.92 90 bottom
U$349  [#LED#10]  66.69,70.59 90 bottom
U$350  [#3V3#4]  92.46,120 270 top
U$351  [##ERR##5]  77.22,120 270 top
U$352  [#_POWER_INPUT_3#6#16V_#0]  90.88,82.13 0 top
U$353  [B#0]  45.06,157.72 0 top
U$354  [B#1]  45.06,162.74 0 top
U$355  [A#2]  45.07,147.72 0 top
U$356  [A#3]  45.06,152.67 0 top
U$357  [GND6]  19.56,169.42 0 top
U$358  [VM10]  43.69,134.87 90 top
U$359  [GND6]  48.77,134.87 90 top
U$360  [OFF0]  43.8,166.04 90 top
U$361  [OSCM0]  26.36,163.08 90 top
U$362  [CUR0]  37.31,163.86 0 top
U$363  [ADJ0]  37.31,162.59 0 top
U$364  [CURRENT_ADJUST]  38.15,164.57 0 top
U$365  [MODE30]  19.56,133.48 0 top
U$366  [MODE10]  19.56,143.51 0 top
U$367  [MODE20]  19.56,138.56 0 top
U$368  [MODE00]  19.56,148.59 0 top
U$369  [#GND_#0]  51.31,131.06 0 top
U$370  [#VM_#0]  52.07,133.6 0 top
U$371  [GND6]  28.85,138.63 0 top
U$372  [VM10]  34.59,138.66 0 top
U$373  [TC78H670FTG0]  37.79,141.23 0 top
U$374  [STEPPER_MOTOR_DRIVER0]  37.86,142.57 0 top
U$375  [#GND#0]  20.87,174.84 270 top
U$376  [PRODRIVER0]  37.41,144.09 0 top
U$377  [#MTR#0]  44.62,170.95 0 top
U$378  [#ENABLE#0]  48.91,170.95 0 top
U$379  [B#1]  39.54,159.01 0 top
U$380  [B#0]  39.56,156.47 0 top
U$381  [A#3]  39.58,153.96 0 top
U$382  [A#2]  39.55,151.41 0 top
U$383  [EN0]  19.56,154.31 0 top
U$384  [#EN#2]  28.46,177.66 270 top
U$385  [#MODE0#4]  31,177.66 270 top
U$386  [#MODE1#4]  33.54,177.66 270 top
U$387  [#MODE2#4]  36.08,177.66 270 top
U$388  [#MODE3#4]  38.62,177.66 270 top
U$389  [#VREF#0]  43.7,177.66 270 top
U$390  [#B##0]  56.71,162.71 0 bottom
U$391  [#B##1]  56.71,157.71 0 bottom
U$392  [#A##2]  56.63,152.72 0 bottom
U$393  [#A##3]  56.67,147.71 0 bottom
U$394  [#GND#5]  9.81,169.27 0 bottom
U$395  [#_EN_#0]  9.76,154.28 0 bottom
U$396  [#B##0]  39.56,158.96 0 bottom
U$397  [#B##1]  39.56,156.42 0 bottom
U$398  [#A##2]  39.56,153.88 0 bottom
U$399  [#A##3]  39.56,151.34 0 bottom
U$400  [#MODE0#0]  9.76,148.35 0 bottom
U$401  [#MODE1#0]  9.88,143.38 0 bottom
U$402  [#MODE2#0]  9.75,138.37 0 bottom
U$403  [#MODE3#0]  9.69,133.39 0 bottom
U$404  [#CLK#S_CLK#0]  19.43,138.48 0 bottom
U$405  [#SET_EN#LATCH#0]  21.18,143.46 0 bottom
U$406  [#UP#DW#S_DATA#0]  21.35,148.43 0 bottom
U$407  [#VM#0]  53.64,133.52 0 bottom
U$408  [#GND#0]  53.23,131 0 bottom
U$409  [#VM#0]  43.74,125.08 90 bottom
U$410  [#GND#0]  48.72,124.99 90 bottom
U$411  [#CW#CCW#0]  18.38,133.44 0 bottom
U$412  [PWR0]  7.39,128.34 0 top
U$413  [TC78H670FTG0]  18.47,154.74 90 bottom
U$414  [STEPPER_MOTOR_DRIVER0]  20.45,151.22 90 bottom
U$415  [PRODRIVER0]  22.63,154.69 90 bottom
U$416  [##STBY##0]  13.13,164.27 0 bottom
U$417  [##STBY##1]  23.38,177.66 270 top
U$418  [#STBY#2]  19.56,164.48 0 top
U$419  [#ERR#3]  19.57,159.49 0 top
U$420  [##ERR##5]  12.48,159.22 0 bottom
U$421  [USER0]  56.78,165.46 90 top
U$422  [#OSCM_BP#0]  32.09,160.87 0 top
U$423  PRODRIVER_LOGO  [PRODRIVER_LOGO]  46.1,142.88 90 bottom
U$424  [OSHW-LOGO-S]  33.53,124.71 0 bottom
U$425  [#MODE0#1]  30.99,177.8 90 bottom
U$426  [#MODE1#1]  33.53,177.8 90 bottom
U$427  [#MODE2#2]  36.07,177.8 90 bottom
U$428  [#MODE3#3]  38.61,177.8 90 bottom
U$429  [#3V3#4]  41.15,177.8 90 bottom
U$430  [#VREF#4]  43.69,177.8 90 bottom
U$431  [#EN#5]  28.45,177.8 90 bottom
U$432  [##ERR##6]  25.91,177.8 90 bottom
U$433  [##STBY##7]  23.37,177.8 90 bottom
U$434  [#GND#8]  20.83,177.8 90 bottom
U$435  [#PTC_BP#9]  35.85,139.67 90 bottom
U$436  [#D1_BP#10]  29.15,139.58 90 bottom
U$437  [#LED#10]  15.38,128.24 90 bottom
U$438  [#3V3#4]  41.16,177.66 270 top
U$439  [##ERR##5]  25.92,177.66 270 top
U$440  [#_POWER_INPUT_3#6#16V_#0]  39.57,139.79 0 top
U$441  [B#0]  96.37,157.72 0 top
U$442  [B#1]  96.37,162.74 0 top
U$443  [A#2]  96.38,147.72 0 top
U$444  [A#3]  96.37,152.67 0 top
U$445  [GND6]  70.87,169.42 0 top
U$446  [VM10]  95,134.87 90 top
U$447  [GND6]  100.08,134.87 90 top
U$448  [OFF0]  95.11,166.04 90 top
U$449  [OSCM0]  77.67,163.08 90 top
U$450  [CUR0]  88.62,163.86 0 top
U$451  [ADJ0]  88.62,162.59 0 top
U$452  [CURRENT_ADJUST]  89.46,164.57 0 top
U$453  [MODE30]  70.87,133.48 0 top
U$454  [MODE10]  70.87,143.51 0 top
U$455  [MODE20]  70.87,138.56 0 top
U$456  [MODE00]  70.87,148.59 0 top
U$457  [#GND_#0]  102.62,131.06 0 top
U$458  [#VM_#0]  103.38,133.6 0 top
U$459  [GND6]  80.16,138.63 0 top
U$460  [VM10]  85.9,138.66 0 top
U$461  [TC78H670FTG0]  89.1,141.23 0 top
U$462  [STEPPER_MOTOR_DRIVER0]  89.17,142.57 0 top
U$463  [#GND#0]  72.17,174.84 270 top
U$464  [PRODRIVER0]  88.72,144.09 0 top
U$465  [#MTR#0]  95.92,170.95 0 top
U$466  [#ENABLE#0]  100.22,170.95 0 top
U$467  [B#1]  90.85,159.01 0 top
U$468  [B#0]  90.86,156.47 0 top
U$469  [A#3]  90.88,153.96 0 top
U$470  [A#2]  90.86,151.41 0 top
U$471  [EN0]  70.87,154.31 0 top
U$472  [#EN#2]  79.76,177.66 270 top
U$473  [#MODE0#4]  82.3,177.66 270 top
U$474  [#MODE1#4]  84.84,177.66 270 top
U$475  [#MODE2#4]  87.38,177.66 270 top
U$476  [#MODE3#4]  89.92,177.66 270 top
U$477  [#VREF#0]  95,177.66 270 top
U$478  [#B##0]  108.01,162.71 0 bottom
U$479  [#B##1]  108.01,157.71 0 bottom
U$480  [#A##2]  107.94,152.72 0 bottom
U$481  [#A##3]  107.98,147.71 0 bottom
U$482  [#GND#5]  61.12,169.27 0 bottom
U$483  [#_EN_#0]  61.07,154.28 0 bottom
U$484  [#B##0]  90.87,158.96 0 bottom
U$485  [#B##1]  90.87,156.42 0 bottom
U$486  [#A##2]  90.87,153.88 0 bottom
U$487  [#A##3]  90.87,151.34 0 bottom
U$488  [#MODE0#0]  61.06,148.35 0 bottom
U$489  [#MODE1#0]  61.19,143.38 0 bottom
U$490  [#MODE2#0]  61.06,138.37 0 bottom
U$491  [#MODE3#0]  61,133.39 0 bottom
U$492  [#CLK#S_CLK#0]  70.74,138.48 0 bottom
U$493  [#SET_EN#LATCH#0]  72.49,143.46 0 bottom
U$494  [#UP#DW#S_DATA#0]  72.65,148.43 0 bottom
U$495  [#VM#0]  104.95,133.52 0 bottom
U$496  [#GND#0]  104.54,131 0 bottom
U$497  [#VM#0]  95.05,125.08 90 bottom
U$498  [#GND#0]  100.03,124.99 90 bottom
U$499  [#CW#CCW#0]  69.69,133.44 0 bottom
U$500  [PWR0]  58.7,128.34 0 top
U$501  [TC78H670FTG0]  69.77,154.74 90 bottom
U$502  [STEPPER_MOTOR_DRIVER0]  71.76,151.22 90 bottom
U$503  [PRODRIVER0]  73.94,154.69 90 bottom
U$504  [##STBY##0]  64.44,164.27 0 bottom
U$505  [##STBY##1]  74.68,177.66 270 top
U$506  [#STBY#2]  70.87,164.48 0 top
U$507  [#ERR#3]  70.88,159.49 0 top
U$508  [##ERR##5]  63.78,159.22 0 bottom
U$509  [USER0]  108.09,165.46 90 top
U$510  [#OSCM_BP#0]  83.4,160.87 0 top
U$511  PRODRIVER_LOGO  [PRODRIVER_LOGO]  97.41,142.88 90 bottom
U$512  [OSHW-LOGO-S]  84.84,124.71 0 bottom
U$513  [#MODE0#1]  82.3,177.8 90 bottom
U$514  [#MODE1#1]  84.84,177.8 90 bottom
U$515  [#MODE2#2]  87.38,177.8 90 bottom
U$516  [#MODE3#3]  89.92,177.8 90 bottom
U$517  [#3V3#4]  92.46,177.8 90 bottom
U$518  [#VREF#4]  95,177.8 90 bottom
U$519  [#EN#5]  79.76,177.8 90 bottom
U$520  [##ERR##6]  77.22,177.8 90 bottom
U$521  [##STBY##7]  74.68,177.8 90 bottom
U$522  [#GND#8]  72.14,177.8 90 bottom
U$523  [#PTC_BP#9]  87.16,139.67 90 bottom
U$524  [#D1_BP#10]  80.45,139.58 90 bottom
U$525  [#LED#10]  66.69,128.24 90 bottom
U$526  [#3V3#4]  92.46,177.66 270 top
U$527  [##ERR##5]  77.22,177.66 270 top
U$528  [#_POWER_INPUT_3#6#16V_#0]  90.88,139.79 0 top
VR1  10k  [TRIMPOT-SMD-3MM-CLOSED]  36.07,48.77 180 top
VR2  10k  [TRIMPOT-SMD-3MM-CLOSED]  87.38,48.77 180 top
VR3  10k  [TRIMPOT-SMD-3MM-CLOSED]  36.07,106.43 180 top
VR4  10k  [TRIMPOT-SMD-3MM-CLOSED]  87.38,106.43 180 top
VR5  10k  [TRIMPOT-SMD-3MM-CLOSED]  36.07,164.08 180 top
VR6  10k  [TRIMPOT-SMD-3MM-CLOSED]  87.38,164.08 180 top

## Library data of the parts
C1 C5 C9 C13 C17 C21 = SparkFun-Capacitors; PROD_ID: CAP-07885
C2 C6 C10 C14 C18 C22 = SparkFun-Capacitors; PROD_ID: CAP-08478
C3 C4 C7 C8 C11 C12 C15 C16 C19 C20 C23 C24 = SparkFun-Capacitors; PROD_ID: CAP-00810
D1 D3 D5 D7 D9 D11 = SparkFun-DiscreteSemi; PROD_ID: DIO-09886
D1BP D1BP1-D1BP5 JP1-JP6 OSCMBP OSCMBP1-OSCMBP5 PTCBP PTCBP1-PTCBP5 = SparkFun-Jumpers
D2 D4 D6 D8 D10 D12 = SparkFun-LED; PROD_ID: DIO-00819
E$1-E$4 FID1-FID24 LOGO1-LOGO24 U$71 U$160 U$248 U$336 U$424 U$512 = SparkFun-Aesthetics
E$5 = SparkFun-Retired
F1-F6 = TC78H670FTG; PROD_ID: RES-15179
J1 J11 J19 J27 J35 J43 = SparkFun-Connectors; PROD_ID: CONN-08106; SF_ID: PRT-12748
J2 J10 J18 J26 J34 J42 = SparkFun-Connectors; PROD_ID: CONN-14720; STOREFRONT_SKU: PRT-15898
J3 J6 J14 J16 J22 J24 J30 J32 J38 J40 J46 J48 = SparkFun-Connectors
J4 J5 J7 J9 J12 J15 J17 J20 J23 J25 J28 J31 J33 J36 J39 J41 J44 J47 = SparkFun-Connectors; PROD_ID: CONN-14722; STOREFRONT_SKU: PRT-15900
J8 J13 J21 J29 J37 J45 = SparkFun-Connectors; PROD_ID: CONN-09696
R1 R15 R29 R43 R57 R71 = SparkFun-Resistors; PROD_ID: RES-00824
R2 R16 R30 R44 R58 R72 = SparkFun-Resistors; PROD_ID: RES-07871
R3 R17 R31 R45 R59 R73 = SparkFun-Resistors
R4 R18 R32 R46 R60 R74 = SparkFun-Resistors; PROD_ID: RES-07849
R5 R19 R33 R47 R61 R75 = SparkFun-Resistors; PROD_ID: RES-07864
R6 R20 R34 R48 R62 R76 = SparkFun-Resistors; PROD_ID: RES-10646
R7-R12 R21-R26 R35-R40 R49-R54 R63-R68 R77-R82 = SparkFun-Resistors; PROD_ID: RES-07853
R13 R27 R41 R55 R69 R83 = SparkFun-Resistors; PROD_ID: RES-08609
R14 R28 R42 R56 R70 R84 = SparkFun-Resistors; PROD_ID: RES-07856
S1-S6 = SparkFun-Switches; PROD_ID: SWCH-08261; SF_SKU: COM-00102
STANDOFF1-STANDOFF24 = SparkFun-Electromechanical
U1 U3 U5 U7 U9 U11 = TC78H670FTG; PROD_ID: IC-15170
U2 U4 U6 U8 U10 U12 = SparkFun-IC-Power; PROD_ID: VREG-08170
U$1-U$21 U$23-U$34 U$36-U$40 U$42-U$70 U$72-U$74 U$76-U$99 U$101-U$158 U$161-U$173 U$176-U$187 U$189-U$246 U$249-U$261 U$264-U$275 U$277-U$334 U$337-U$349 U$352-U$363 U$365-U$422 U$425-U$437 U$440-U$451 U$453-U$510 U$513-U$525 U$528 = output
U$22 U$41 U$100 U$159 U$188 U$247 U$276 U$335 U$364 U$423 U$452 U$511 = TC78H670FTG
U$35 U$75 U$174 U$175 U$262 U$263 U$350 U$351 U$438 U$439 U$526 U$527 = output2
VR1-VR6 = SparkFun-Resistors; PROD_ID: RES-09285

## Nets
3.3V: J6.2 JP4.2 R4.1 R6.2 R7.2 R8.2 R9.2 R10.2 U2.2 U2.4
3.3V1: J16.2 JP1.2 R18.1 R20.2 R21.2 R22.2 R23.2 R24.2 U4.2 U4.4
3.3V2: J24.2 JP2.2 R32.1 R34.2 R35.2 R36.2 R37.2 R38.2 U6.2 U6.4
3.3V3: J32.2 JP3.2 R46.1 R48.2 R49.2 R50.2 R51.2 R52.2 U8.2 U8.4
3.3V4: J40.2 JP5.2 R60.1 R62.2 R63.2 R64.2 R65.2 R66.2 U10.2 U10.4
3.3V5: J48.2 JP6.2 R74.1 R76.2 R77.2 R78.2 R79.2 R80.2 U12.2 U12.4
!ERR: C1.1 J4.2 J6.8 R1.2 U1.13
!ERR1: C5.1 J15.2 J16.8 R15.2 U3.13
!ERR2: C9.1 J23.2 J24.8 R29.2 U5.13
!ERR3: C13.1 J31.2 J32.8 R43.2 U7.13
!ERR4: C17.1 J39.2 J40.8 R57.2 U9.13
!ERR5: C21.1 J47.2 J48.8 R71.2 U11.13
!STBY: J4.3 J6.9 R12.1 U1.12
!STBY1: J15.3 J16.9 R26.1 U3.12
!STBY2: J23.3 J24.9 R40.1 U5.12
!STBY3: J31.3 J32.9 R54.1 U7.12
!STBY4: J39.3 J40.9 R68.1 U9.12
!STBY5: J47.3 J48.9 R82.1 U11.12
EN: J4.1 J6.7 S1.1
EN1: J15.1 J16.7 S2.1
EN2: J23.1 J24.7 S3.1
EN3: J31.1 J32.7 S4.1
EN4: J39.1 J40.7 S5.1
EN5: J47.1 J48.7 S6.1
GND: C1.2 C2.- C3.2 C4.2 D2.C J1.GND J1.P$4 J2.1 J3.1 J4.4 J6.10 R2.1 R3.P$1 R5.1 R11.2 R12.2 U1.2 U1.4 U1.9 U1.17 VR1.3
GND1: C5.2 C6.- C7.2 C8.2 D4.C J10.1 J11.GND J11.P$4 J14.1 J15.4 J16.10 R16.1 R17.P$1 R19.1 R25.2 R26.2 U3.2 U3.4 U3.9 U3.17 VR2.3
GND2: C9.2 C10.- C11.2 C12.2 D6.C J18.1 J19.GND J19.P$4 J22.1 J23.4 J24.10 R30.1 R31.P$1 R33.1 R39.2 R40.2 U5.2 U5.4 U5.9 U5.17 VR3.3
GND3: C13.2 C14.- C15.2 C16.2 D8.C J26.1 J27.GND J27.P$4 J30.1 J31.4 J32.10 R44.1 R45.P$1 R47.1 R53.2 R54.2 U7.2 U7.4 U7.9 U7.17 VR4.3
GND4: C17.2 C18.- C19.2 C20.2 D10.C J34.1 J35.GND J35.P$4 J38.1 J39.4 J40.10 R58.1 R59.P$1 R61.1 R67.2 R68.2 U9.2 U9.4 U9.9 U9.17 VR5.3
GND5: C21.2 C22.- C23.2 C24.2 D12.C J42.1 J43.GND J43.P$4 J46.1 J47.4 J48.10 R72.1 R73.P$1 R75.1 R81.2 R82.2 U11.2 U11.4 U11.9 U11.17 VR6.3
MODE0: J5.4 J6.6 R10.1 U1.14
MODE1: J5.3 J6.5 R9.1 U1.15
MODE2: J5.2 J6.4 R8.1 U1.16
MODE3: J5.1 J6.3 R7.1 U1.1
MODE4: J9.1 J16.3 R21.1 U3.1
MODE5: J9.2 J16.4 R22.1 U3.16
MODE6: J9.3 J16.5 R23.1 U3.15
MODE7: J9.4 J16.6 R24.1 U3.14
MODE8: J17.1 J24.3 R35.1 U5.1
MODE9: J17.2 J24.4 R36.1 U5.16
MODE10: J17.3 J24.5 R37.1 U5.15
MODE11: J17.4 J24.6 R38.1 U5.14
MODE12: J25.1 J32.3 R49.1 U7.1
MODE13: J25.2 J32.4 R50.1 U7.16
MODE14: J25.3 J32.5 R51.1 U7.15
MODE15: J25.4 J32.6 R52.1 U7.14
MODE16: J33.1 J40.3 R63.1 U9.1
MODE17: J33.2 J40.4 R64.1 U9.16
MODE18: J33.3 J40.5 R65.1 U9.15
MODE19: J33.4 J40.6 R66.1 U9.14
MODE20: J41.1 J48.3 R77.1 U11.1
MODE21: J41.2 J48.4 R78.1 U11.16
MODE22: J41.3 J48.5 R79.1 U11.15
MODE23: J41.4 J48.6 R80.1 U11.14
N$1: D1.C D1BP.2 F1.1 PTCBP.1
N$2: OSCMBP.1 R2.2
N$3: F1.2 PTCBP.2 R13.1
N$4: R4.2 R5.2 U2.1
N$5: R6.1 VR1.1
N$6: D2.A R14.2
N$7: R1.1 R11.1 S1.2
N$8: JP4.1 R14.1
N$10: OSCMBP1.1 R16.2
N$11: R18.2 R19.2 U4.1
N$13: R20.1 VR2.1
N$14: D1BP1.2 D3.C F2.1 PTCBP1.1
N$15: F2.2 PTCBP1.2 R27.1
N$16: D4.A R28.2
N$17: JP1.1 R28.1
N$18: R15.1 R25.1 S2.2
N$21: OSCMBP2.1 R30.2
N$22: R32.2 R33.2 U6.1
N$23: R34.1 VR3.1
N$24: D1BP2.2 D5.C F3.1 PTCBP2.1
N$25: F3.2 PTCBP2.2 R41.1
N$26: D6.A R42.2
N$27: JP2.1 R42.1
N$28: R29.1 R39.1 S3.2
N$31: OSCMBP3.1 R44.2
N$32: R46.2 R47.2 U8.1
N$33: R48.1 VR4.1
N$34: D1BP3.2 D7.C F4.1 PTCBP3.1
N$35: F4.2 PTCBP3.2 R55.1
N$36: D8.A R56.2
N$37: JP3.1 R56.1
N$38: R43.1 R53.1 S4.2
N$41: OSCMBP4.1 R58.2
N$42: R60.2 R61.2 U10.1
N$43: R62.1 VR5.1
N$44: D1BP4.2 D9.C F5.1 PTCBP4.1
N$45: F5.2 PTCBP4.2 R69.1
N$46: D10.A R70.2
N$47: JP5.1 R70.1
N$48: R57.1 R67.1 S5.2
N$51: OSCMBP5.1 R72.2
N$52: R74.2 R75.2 U12.1
N$53: R76.1 VR6.1
N$54: D1BP5.2 D11.C F6.1 PTCBP5.1
N$55: F6.2 PTCBP5.2 R83.1
N$56: D12.A R84.2
N$57: JP6.1 R84.1
N$58: R71.1 R81.1 S6.2
OSCM: OSCMBP.2 R3.P$2 U1.11
OSCM1: OSCMBP1.2 R17.P$2 U3.11
OSCM2: OSCMBP2.2 R31.P$2 U5.11
OSCM3: OSCMBP3.2 R45.P$2 U7.11
OSCM4: OSCMBP4.2 R59.P$2 U9.11
OSCM5: OSCMBP5.2 R73.P$2 U11.11
OUT_A+: J7.4 J8.4 U1.5
OUT_A+1: J12.4 J13.4 U3.5
OUT_A+2: J20.4 J21.4 U5.5
OUT_A+3: J28.4 J29.4 U7.5
OUT_A+4: J36.4 J37.4 U9.5
OUT_A+5: J44.4 J45.4 U11.5
OUT_A-: J7.3 J8.3 U1.6
OUT_A-1: J12.3 J13.3 U3.6
OUT_A-2: J20.3 J21.3 U5.6
OUT_A-3: J28.3 J29.3 U7.6
OUT_A-4: J36.3 J37.3 U9.6
OUT_A-5: J44.3 J45.3 U11.6
OUT_B+: J7.1 J8.1 U1.8
OUT_B+1: J12.1 J13.1 U3.8
OUT_B+2: J20.1 J21.1 U5.8
OUT_B+3: J28.1 J29.1 U7.8
OUT_B+4: J36.1 J37.1 U9.8
OUT_B+5: J44.1 J45.1 U11.8
OUT_B-: J7.2 J8.2 U1.7
OUT_B-1: J12.2 J13.2 U3.7
OUT_B-2: J20.2 J21.2 U5.7
OUT_B-3: J28.2 J29.2 U7.7
OUT_B-4: J36.2 J37.2 U9.7
OUT_B-5: J44.2 J45.2 U11.7
RAW: D1.A D1BP.1 J1.VIN0 J2.2 J3.2
RAW1: D1BP1.1 D3.A J10.2 J11.VIN0 J14.2
RAW2: D1BP2.1 D5.A J18.2 J19.VIN0 J22.2
RAW3: D1BP3.1 D7.A J26.2 J27.VIN0 J30.2
RAW4: D1BP4.1 D9.A J34.2 J35.VIN0 J38.2
RAW5: D1BP5.1 D11.A J42.2 J43.VIN0 J46.2
VM: C2.+ C3.1 R13.2 U1.3 U2.3
VM1: C6.+ C7.1 R27.2 U3.3 U4.3
VM2: C10.+ C11.1 R41.2 U5.3 U6.3
VM3: C14.+ C15.1 R55.2 U7.3 U8.3
VM4: C18.+ C19.1 R69.2 U9.3 U10.3
VM5: C22.+ C23.1 R83.2 U11.3 U12.3
VREF: C4.1 J6.1 U1.10 VR1.2
VREF1: C8.1 J16.1 U3.10 VR2.2
VREF2: C12.1 J24.1 U5.10 VR3.2
VREF3: C16.1 J32.1 U7.10 VR4.2
VREF4: C20.1 J40.1 U9.10 VR5.2
VREF5: C24.1 J48.1 U11.10 VR6.2